# Altium PCB Pyro_Sensor.PcbDoc
Units mil, origin at the board's own origin, x right, y up, seen from the top; angles counter-clockwise.
Board outline 4000 x 4000 mil, 4 copper layers (Top Layer, Ground Plane, Power Plane, Bottom Layer), stack 23.756 mil thick; 57 components, 35 nets, 223 pads, 64 vias.
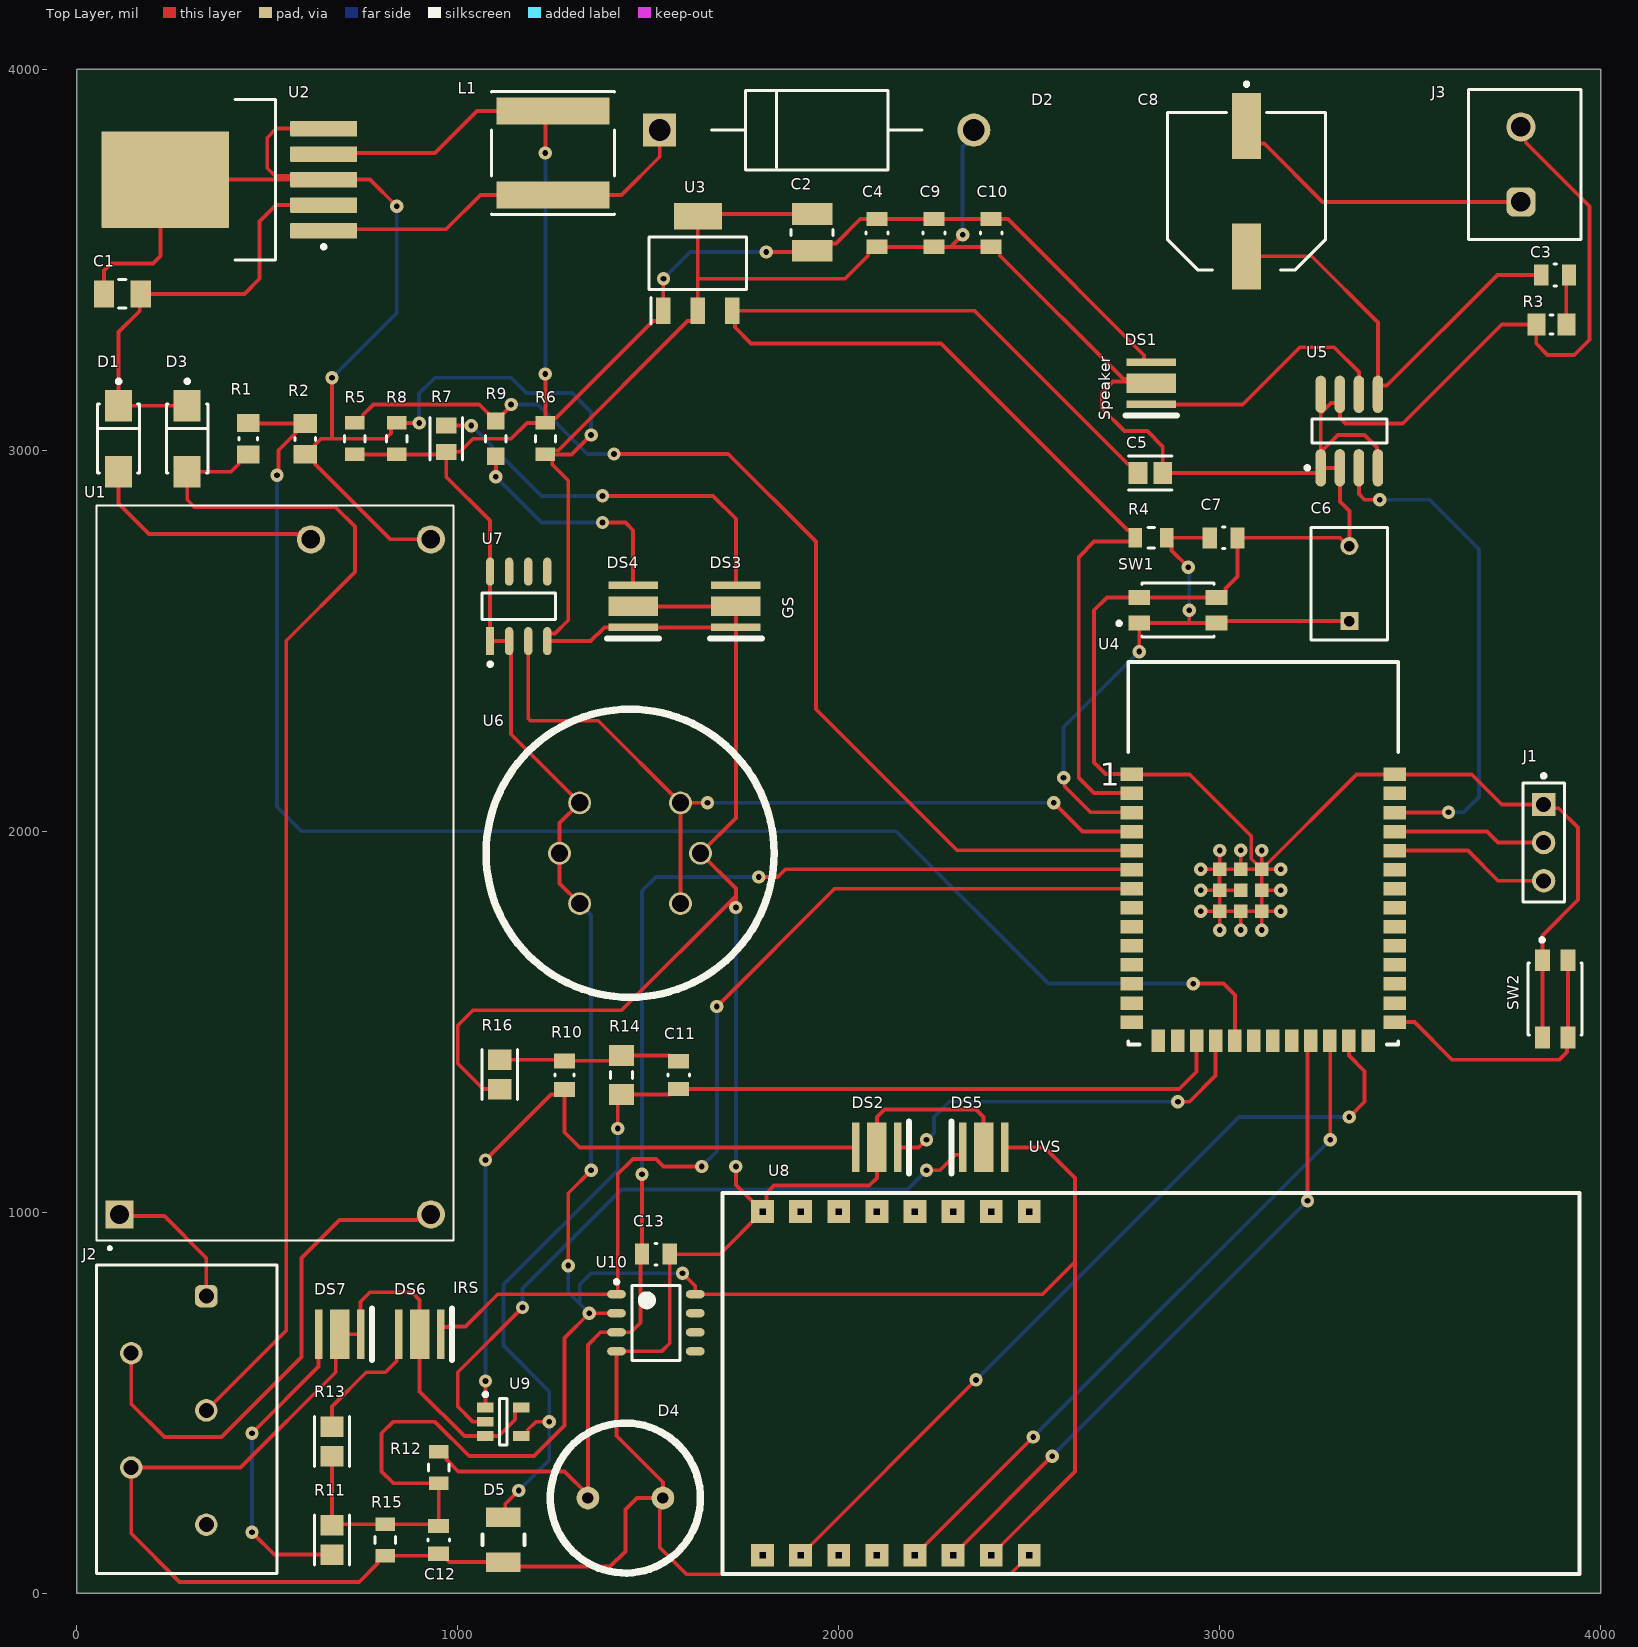
[diagram p0: Top Layer view]
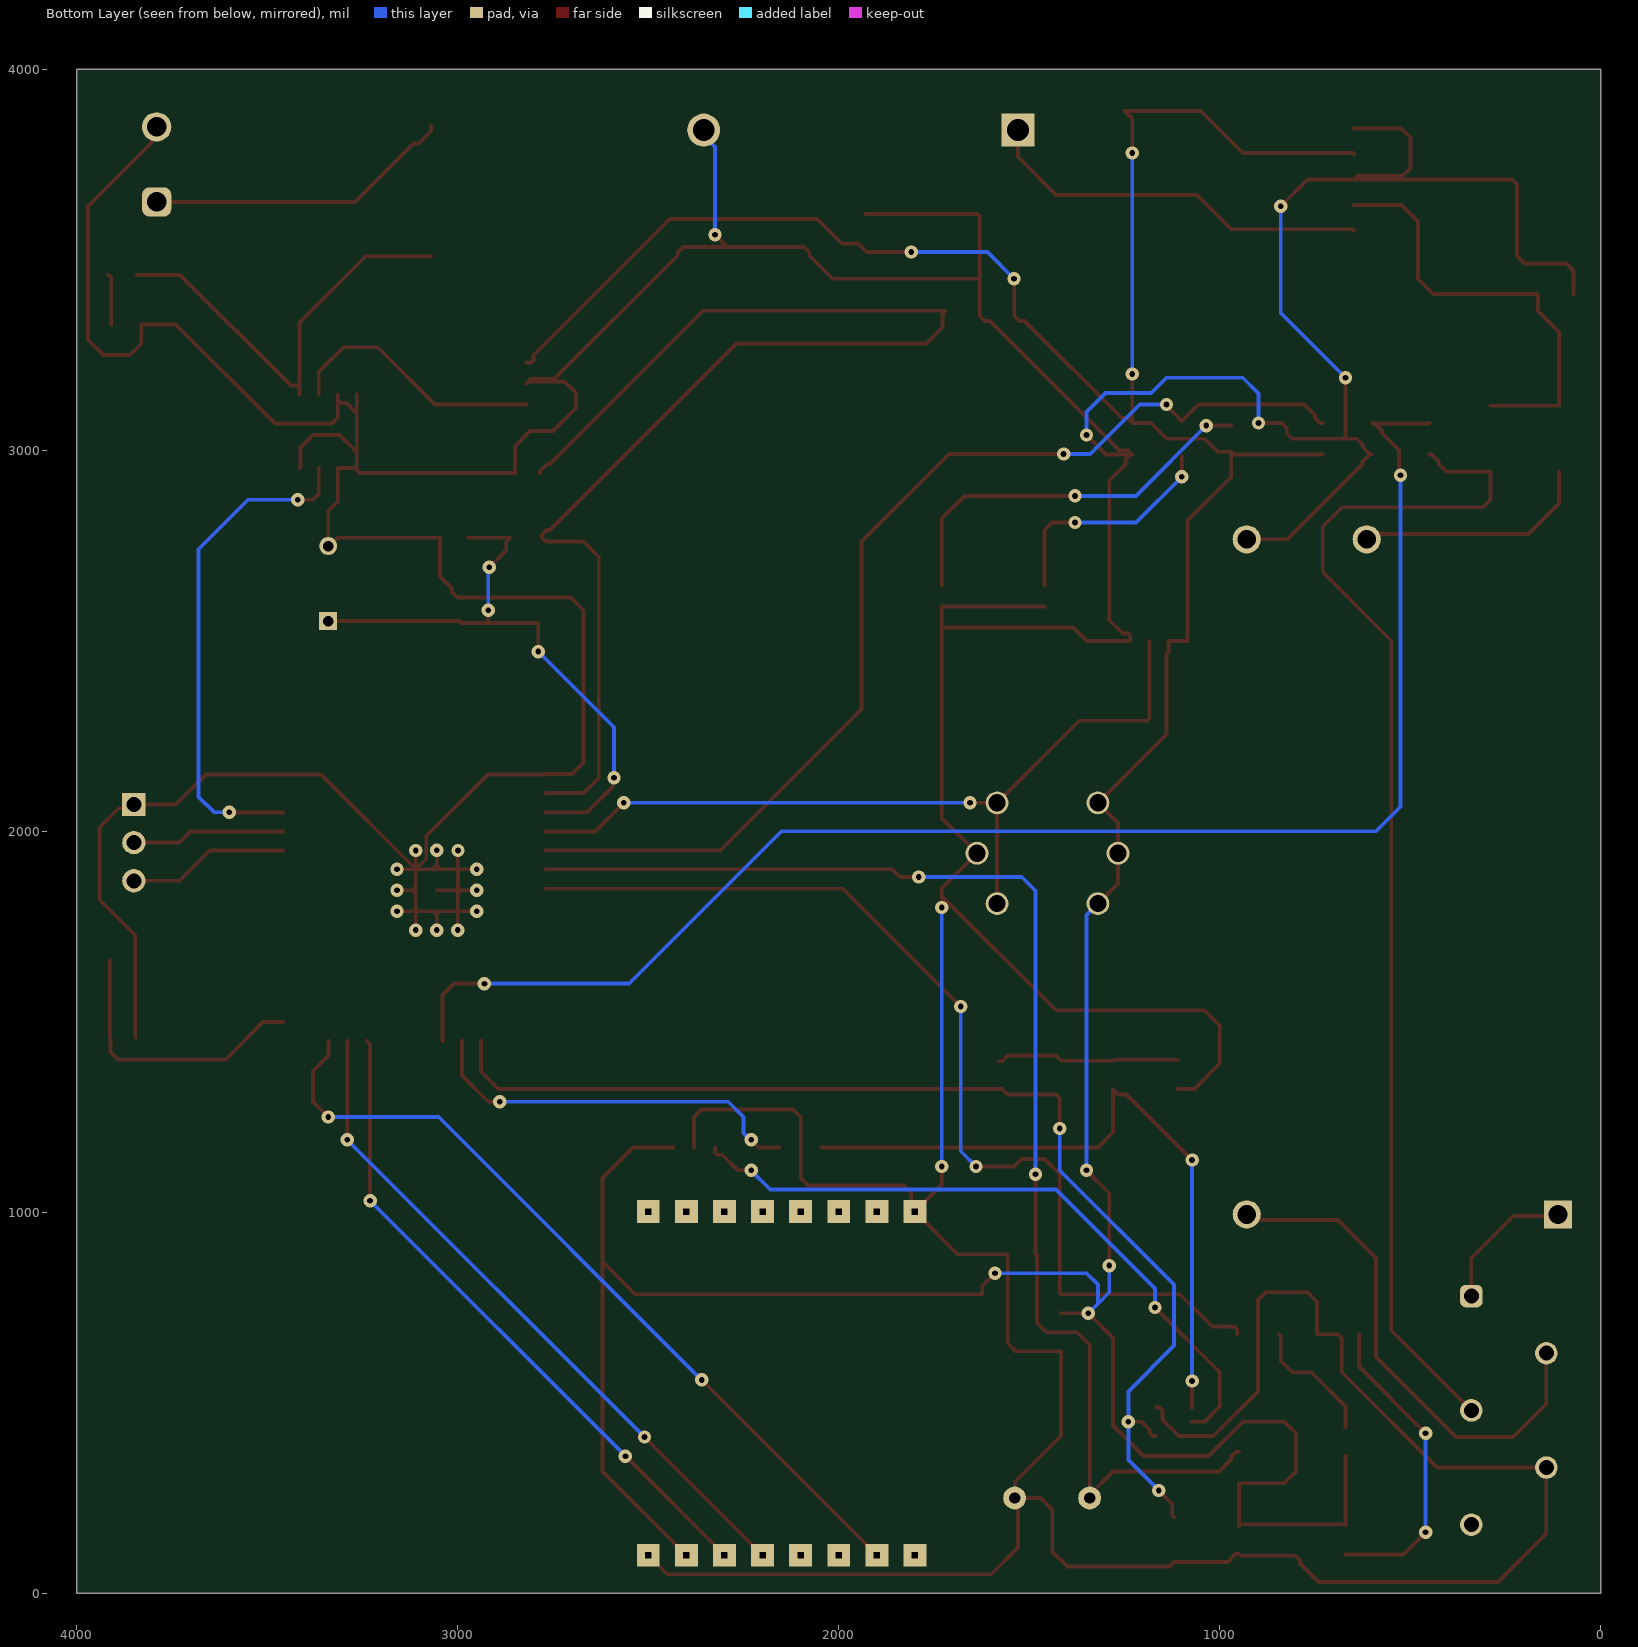
[diagram p1: Bottom Layer view, seen from below]
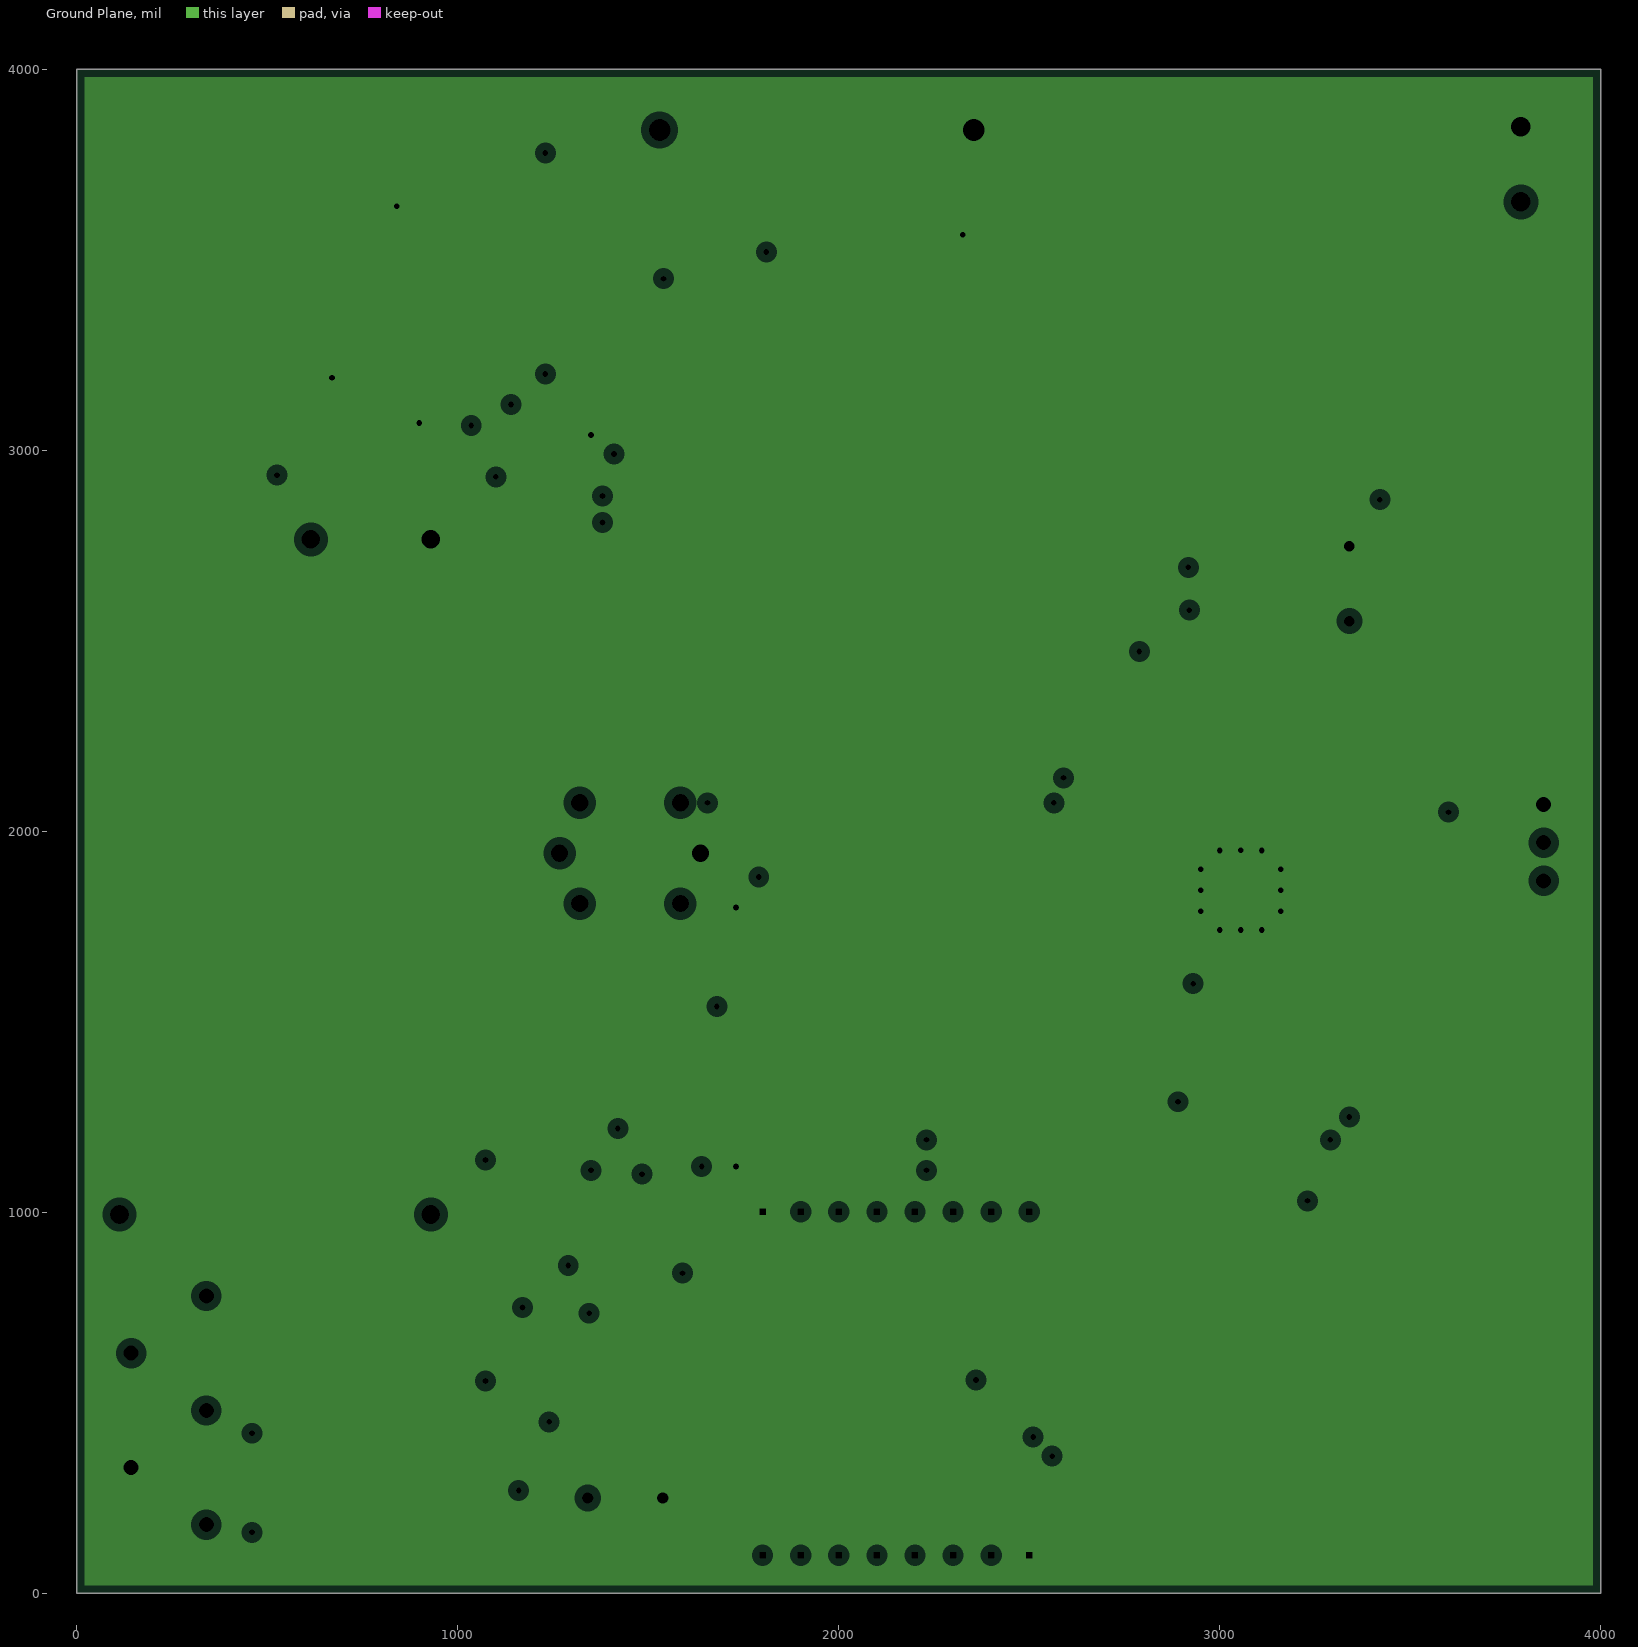
[diagram p2: Ground Plane, clearances drawn from the general rule]
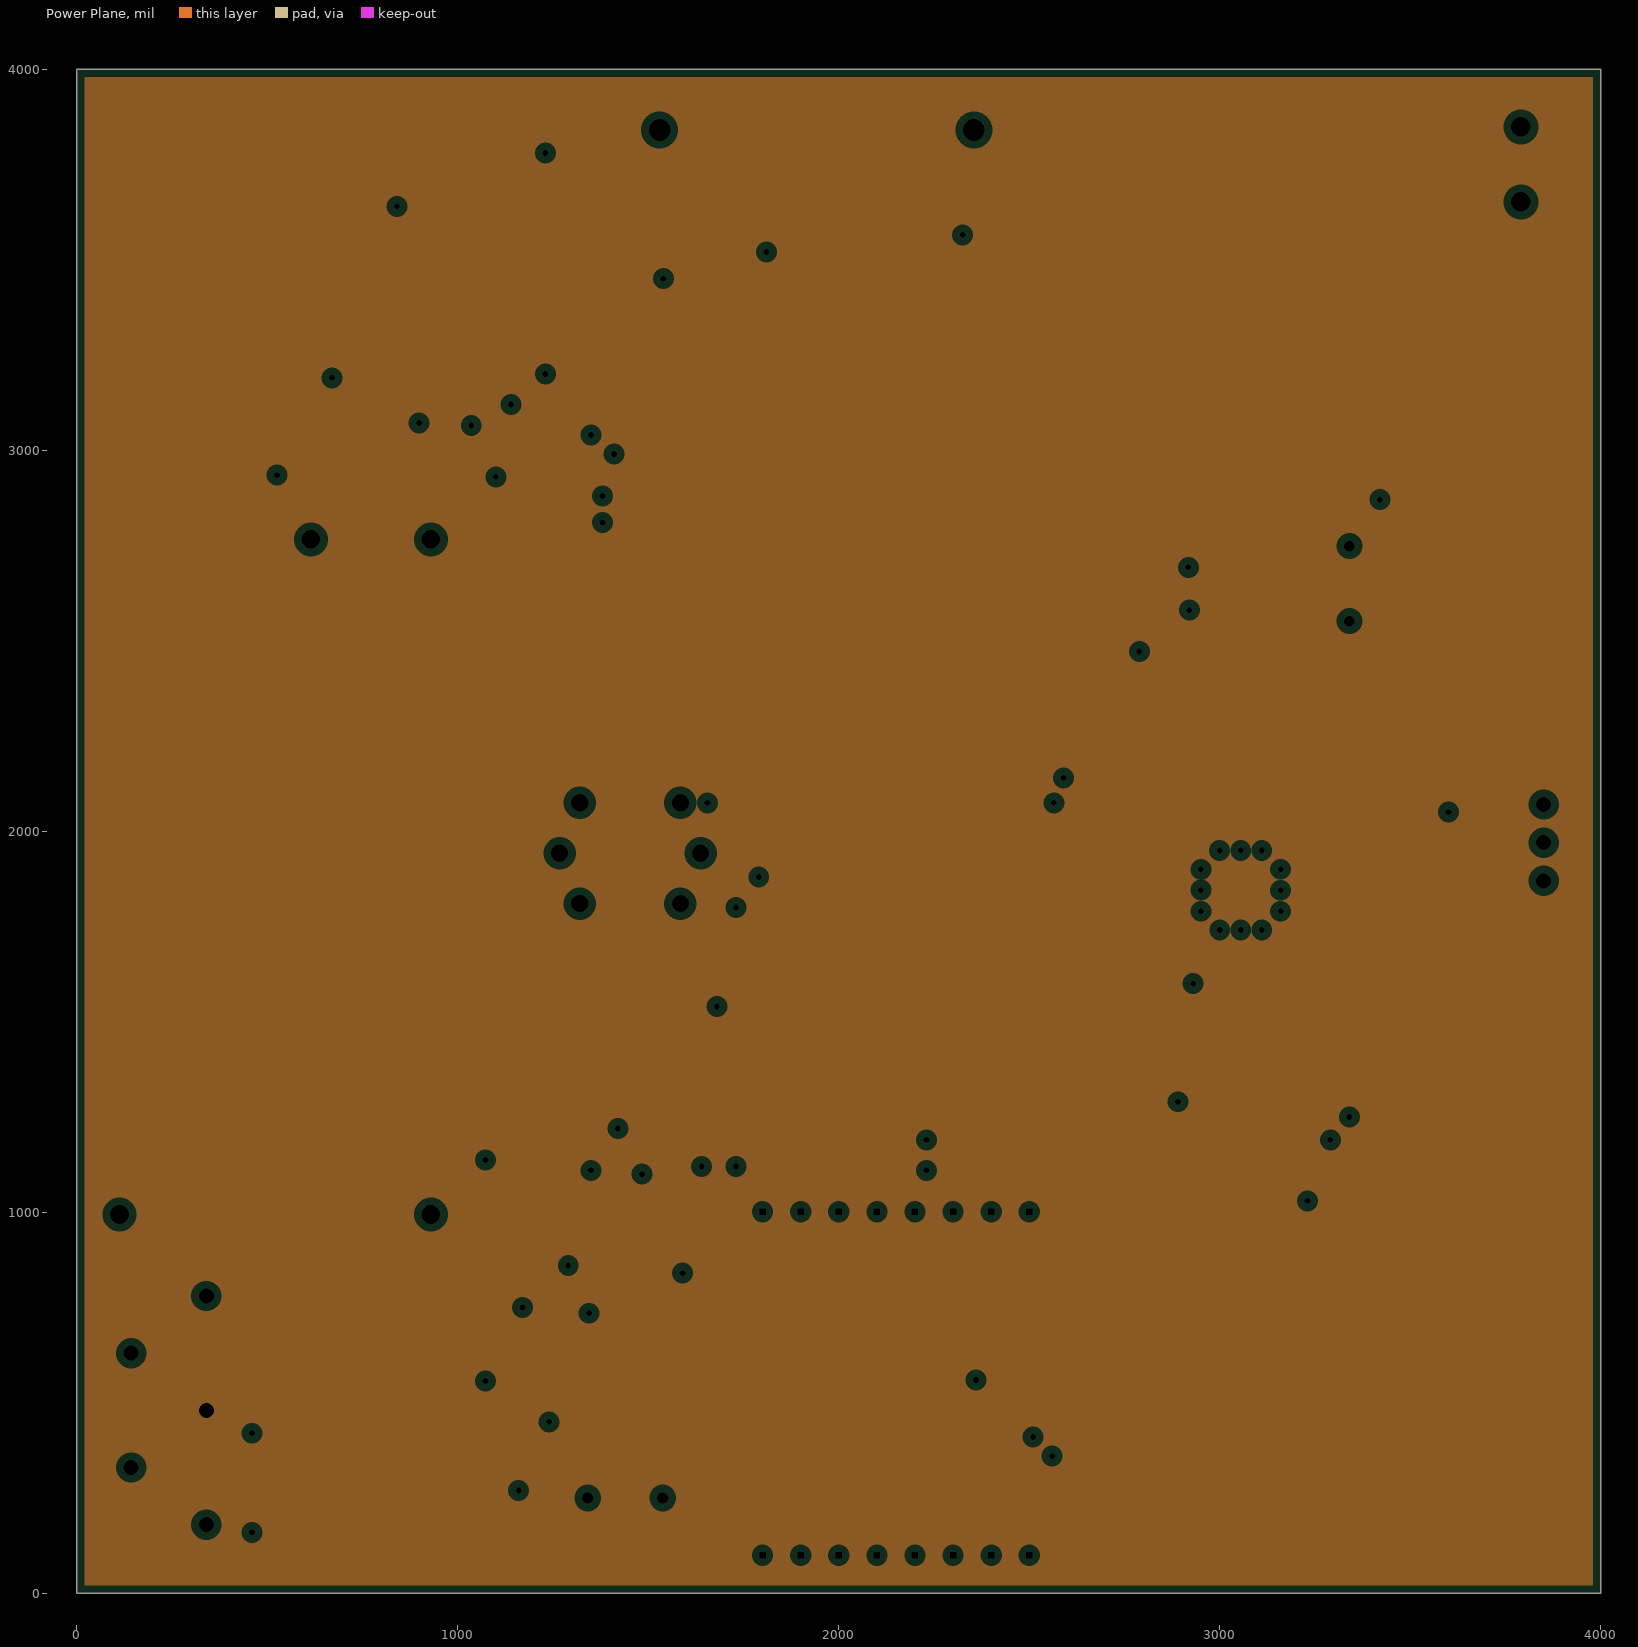
[diagram p3: Power Plane, clearances drawn from the general rule]

## Layer stack, top to bottom
Top Solder: solder mask 0.4, Solder Resist, Dk 3.5
Top Layer: signal copper 1.4
Dielectric 2: prepreg 2.8, PP-006, Dk 4.1
Ground Plane: plane copper 1.378, net GND
Dielectric 1: dielectric 12.6, FR-4, Dk 4.8
Power Plane: plane copper 1.378, net Battery
Dielectric 3: prepreg 2.8, PP-006, Dk 4.1
Bottom Layer: signal copper 1.4
Bottom Solder: solder mask 0.4, Solder Resist, Dk 3.5

## Board outline
0,0 0,4000 4000,4000 4000,0

## Design rules (kind name [scope] priority, off if disabled: settings)
Clearance [All] p1: gap=5 ignorepadtopadclearanceinfootprint=FALSE
ComponentClearance [All] p1 off: gap=10 collisioncheckmode=3 verticalgap=10 showdistances=FALSE
DiffPairsRouting [All] p1: maxlimit=13 minlimit=13 mostfreqgap=13 toplayer_minwidth=7.42 toplayer_maxwidth=13 toplayer_prefwidth=7.42 bottomlayer_minwidth=7.42 bottomlayer_maxwidth=13 bottomlayer_prefwidth=7.42 maxuncoupledlength=500
FabricationTestPointUsage TestPointUsage [All] p1: valid=0 allowmultiple=FALSE
FabricationTestpoint Testpoint [All] p1: side=3 testpointundercomponent=TRUE minsize=40 maxsize=100 preferedsize=60 minholesize=20 maxholesize=40 preferedholesize=32 testpointgrid=1 allowsidetop=TRUE allowsidebottom=TRUE usegrid=TRUE gridtolerance=0.01
Height [All] p1 off: minheight=0 maxheight=1000 prefheight=500
HoleSize [All] p1: absolutevalues=TRUE maxlimit=800 minlimit=10 maxpercent=80.000 minpercent=20.000
MatchedLengths MatchedLengths_I210Rx [InNetClass('I210Rx')] p1: tolerance=5 checknetsindiffpair=FALSE checkdiffpairvsdiffpair=TRUE checkxsignals=TRUE checkothers=TRUE
MatchedLengths MatchedLengths_I210Tx [InNetClass('I210Tx')] p2: tolerance=5 checknetsindiffpair=FALSE checkdiffpairvsdiffpair=TRUE checkxsignals=TRUE checkothers=TRUE
MatchedLengths MatchedLengths_mSATARx [InNetClass('mSATARx')] p3: tolerance=25 checknetsindiffpair=FALSE checkdiffpairvsdiffpair=TRUE checkxsignals=TRUE checkothers=TRUE
MatchedLengths MatchedLengths_mSATATx [InNetClass('mSATATx')] p4: tolerance=25 checknetsindiffpair=FALSE checkdiffpairvsdiffpair=TRUE checkxsignals=TRUE checkothers=TRUE
MatchedLengths MatchedLengths_PCIECLK [InNetClass('PCIECLK')] p5: tolerance=25 checknetsindiffpair=FALSE checkdiffpairvsdiffpair=TRUE checkxsignals=TRUE checkothers=TRUE
MatchedLengths MatchedLengths_PCIETx [InNetClass('PCIETx')] p6: tolerance=5 checknetsindiffpair=FALSE checkdiffpairvsdiffpair=TRUE checkxsignals=TRUE checkothers=TRUE
MatchedLengths MatchedLengths_PCIERx [InNetClass('PCIERx')] p7: tolerance=5 checknetsindiffpair=FALSE checkdiffpairvsdiffpair=TRUE checkxsignals=TRUE checkothers=TRUE
MinimumSolderMaskSliver [All] p1: minsoldermaskwidth=5
PlaneClearance [All] p1: clearance=20
PlaneConnect [All] p1: planeconnectstyle=Relief reliefexpansion=20 reliefentries=4 reliefconductorwidth=15 reliefairgap=10
PolygonConnect [All] p1: connectstyle=Direct reliefconductorwidth=20 reliefentries=4 polygonreliefangle="90 Angle" airgapwidth=30
RoutingVias [All] p1: holewidth=20 width=40 viastyle="Through Hole" minholewidth=15 minwidth=35 maxholewidth=28 maxwidth=50
SilkToSilkClearance [All] p1: silktosilkclearance=5
SilkToSolderMaskClearance SilkscreenOverComponentPads [IsPad] p1: minsilkscreentomaskgap=5 clearancetoexposedcopper=TRUE
SolderMaskExpansion [All] p1: expansion=4 istentingtop=FALSE
SupplyNets "Schematic Supply Nets" [InNet('GND')] p1: voltage=0.000
Width [All] p1: maxlimit=500 minlimit=5 preferedwidth=10
19 further rules are at their usual default settings.

## Components (designator, comment, footprint, x,y, rotation, side; value= is the part's Value field where it differs from the comment)
C1 "GRM31CC80E227ME11K" FP-GRM31C-0_3-e0_3_0_9-IPC_C 120,3410 r0 top
C2 "CL32A157MQVNNNE" FP-CL32-IPC_C 1930,3571.76 r90 top
C3 "CC0805KRX7R9BB104" FP-CC0805-0_85-MFG 3880,3460 r0 top value="100 nF"
C4 "CC0805KRX7R9BB104" FP-CC0805-0_85-MFG 2100,3570 r270 top value="100 nF"
C5 "CL21A106KOQNNNE" FP-CL21-IPC_B 2817.49,2940 r0 top
C6 "R82DC4100DQ60J" FP-R82DC4100DQ60J-MFG 3340,2650 r90 top
C7 "CC0805KRX7R9BB104" FP-CC0805-0_85-MFG 3010,2770 r0 top value="100 nF"
C8 "16SVT1000M" FP-OS-CON-SMT-F12-MFG 3070,3680 r270 top
C9 "CC0805KRX7R9BB104" FP-CC0805-0_85-MFG 2250,3570 r270 top value="100 nF"
C10 "CC0805KRX7R9BB104" FP-CC0805-0_85-MFG 2400,3570 r270 top value="100 nF"
C11 "CC0805KRX7R9BB104" FP-CC0805-0_85-MFG 1580,1360 r90 top value="100 nF"
C12 "CC0805KRX7R9BB104" FP-CC0805-0_85-MFG 950,140 r270 top value="100 nF"
C13 "CC0805KRX7R9BB104" FP-CC0805-0_85-MFG 1520,890 r0 top value="100 nF"
D1 "SMAJ24A" FP-SMAJ-MFG 110,3030 r270 top
D2 "1N5822" FP-DO-201AD-MFG 1942.2,3840 r0 top
D3 "SMAJ24A" FP-SMAJ-MFG 290,3030 r270 top
D4 "IRS" "IRS Thruhole" 1440,250 r180 top
D5 "UVS" "UVS SMD" 1120,81.89 r180 top
DS1 "XPEBRD-L1-0000-00801" CREE-XPEBRD-L1_V 2820,3175.12 r270 top
DS2 "XTEARY-00-0000-000000M09" CREE-XTE-2_V 2100,1170 r0 top
DS3 "XPEBRD-L1-0000-00801" CREE-XPEBRD-L1_V 1730,2590 r270 top
DS4 "XTEARY-00-0000-000000M09" CREE-XTE-2_V 1460,2590 r270 top
DS5 "XPEBRD-L1-0000-00801" CREE-XPEBRD-L1_V 2380,1170 r180 top
DS6 "XTEARY-00-0000-000000M09" CREE-XTE-2_V 900,680 r0 top
DS7 "XPEBRD-L1-0000-00801" CREE-XPEBRD-L1_V 690,680 r0 top
J1 "PREC003SAAN-RC" FP-PREC003SAAN-RC-MFG 3850,1970 r270 top
J2 "691412320005" 691412320005 288.82,456.57 r90 top
J3 "691137710002" 691137710002 3800,3750 r90 top
L1 "NR8040T680M" FP-NR8040-H_4_0-MFG 1250,3780 r90 top
R1 "CRCW08055K60FKEA" FP-CRCW0805-e3-IPC_A 450,3030 r270 top
R2 "RK73H2ATTD3301F" RESC2013X60X30ML20T20 600,3029.65 r90 top
R3 "RC0805FR-0710RL" RESC2013X60X35ML10T20 3870,3330 r0 top
R4 "RMCF0805FT10K0" FP-RMCF0805-MFG 2820,2770 r180 top
R5 "RMCF0805FT10K0" FP-RMCF0805-MFG 730,3030 r90 top
R6 "RMCF0805FT10K0" FP-RMCF0805-MFG 1230,3030 r90 top
R7 "CR0805-JW-331ELF" FP-CR0805-IPC_B 970,3030 r270 top
R8 "RMCF0805FT10K0" FP-RMCF0805-MFG 840,3030 r270 top
R9 "ERA6AEB203V" FP-ERA6A-MFG 1100,3030 r90 top
R10 "CRCW08053K83FKEA" FP-CRCW0805-e3-IPC_B 1280,1360 r90 top
R11 "RR1220P-102-D" FP-RR1220-IPC_A 670,140 r90 top
R12 "RMCF0805FT10K0" FP-RMCF0805-MFG 950,330 r270 top
R13 "RR1220P-102-D" FP-RR1220-IPC_A 670,398.41 r270 top
R14 "RG2012P-105-B-T5" FP-RG2012-MFG 1430,1360 r90 top
R15 "RMCF0805FT10K0" FP-RMCF0805-MFG 810,140 r90 top
R16 "RR1220P-102-D" FP-RR1220-IPC_A 1110,1361.59 r90 top
SW1 "EVQ-P2202W" FP-EVQ-P2202W-MFG 2890,2580 r90 top
SW2 "EVQ-P2202W" FP-EVQ-P2202W-MFG 3880,1560 r0 top
U1 "MFM-15-12_1" CONV_MFM-15-12 520,1890 r90 top
U2 "LM2595S-12/NOPB" KTT0005B_M 400,3710 r180 top
U3 "LM2937IMP-3.3" SOT230P700X180-4N 1630,3490 r90 top
U4 "ESP32-S3-WROOM-1" ESP32 2769.45,2149.06 r0 top
U5 "LM386M-1/NOPB" TI-D8_M 3340,3050 r90 top
U6 "MQ-2" "MQ-2 Thruhole" 1452.23,1942.23 r0 top
U7 "LM358DR2G" FP-751-07-IPC_C 1160,2590 r90 top
U8 "GS" "GS DIP Socket" 2500,1035.04 r270 top
U9 "MCP6001RT-E/OT" SOT-23-OT5_N 1120,450 r0 top
U10 "LM393DT" STM-SO-8_D_L 1520,710 r0 top

## Footprints (in the part's own frame and the unit in brackets; to place one, negate y for a bottom-side part, rotate by r counter-clockwise, add the part's x,y. Pads: shape width x height; smd on the part's side, far side on the other; paste and mask are expansions set on the pad)
691137710002 [mm] "Horizontal Cable Entry with Pressure Clamp, pitch 5mm, 02p"
  rrect50% 1.95x1.95 hole 1.3: 1(-2.5,0.25)
  round 1.95 hole 1.3: 2(2.5,0.25)
  silkscreen extent -5,-3.75 5,3.75, body extent -5,-3.75 5,3.75, height 11.6
691412320005 [mm] "3.81mm 45¡ã Cable Entry Screwless, 5p"
  rrect50% 1.5x1.5 hole 1: 1(8.215,-1.3)
  round 1.5 hole 1: 2(4.405,3.7) 3(0.595,-1.3) 4(-3.215,3.7) 5(-7.025,-1.3)
  silkscreen extent -10.28,-6 10.28,6, body extent -10.28,-6 10.28,6, height 13.28
CONV_MFM-15-12 [mm]
  rect 1.875x1.875 / inner round 1.875 / far side rect 1.875x1.875 hole 1.25: 1(-22.75,10.35)
  round 1.875 hole 1.25: 2(-22.75,-10.4) 3(22.25,-10.4) 4(22.25,-2.4)
  silkscreen extent -25.1,-11.9 24.5,11.9
CREE-XPEBRD-L1_V [mm] "SMD, 3-Leads, Body 3.45x3.45mm"
  rect 0.5x3.3 smd: 1(-1.4,0) 2(1.4,0)
  rect 1.3x3.3 smd paste-1: 3(0,0)
  silkscreen extent 2.15,-1.73 2.15,1.73, body extent -1.72,-1.73 1.73,1.73, height 2.39
CREE-XTE-2_V [mm] "SMD, 3-Leads, Body 3.45x3.45mm"
  rect 0.5x3.3 smd: 1(-1.4,0) 3(1.4,0)
  rect 1.3x3.3 smd: 2(0,0)
  silkscreen extent 2.15,-1.73 2.15,1.73, body extent -1.73,-1.73 1.73,1.73, height 2.36
ESP32 [mm]
  rect 1.5x0.9 smd: 1(0,0) 2(0,-1.27) 3(0,-2.54) 4(0,-3.81) 5(0,-5.08) 6(0,-6.35) 7(0,-7.62) 8(0,-8.89) 9(0,-10.16) 10(0,-11.43) 11(0,-12.7) 12(0,-13.97) 13(0,-15.24) 14(0,-16.51) 27(17.5,-16.51) 28(17.5,-15.24) 29(17.5,-13.97) 30(17.5,-12.7) 31(17.5,-11.43) 32(17.5,-10.16) 33(17.5,-8.89) 34(17.5,-7.62) 35(17.5,-6.35) 36(17.5,-5.08) 37(17.5,-3.81) 38(17.5,-2.54) 39(17.5,-1.27) 40(17.5,0)
  rect 0.9x1.5 smd: 15(1.765,-17.76) 16(3.035,-17.76) 17(4.305,-17.76) 18(5.575,-17.76) 19(6.845,-17.76) 20(8.115,-17.76) 21(9.385,-17.76) 22(10.655,-17.76) 23(11.925,-17.76) 24(13.195,-17.76) 25(14.465,-17.76) 26(15.735,-17.76)
  rect 0.9x0.9 smd: 41(5.85,-9.12) 41(5.85,-7.72) 41(5.85,-6.32) 41(7.25,-9.12) 41(7.25,-7.72) 41(7.25,-6.32) 41(8.65,-9.12) 41(8.65,-7.72) 41(8.65,-6.32)
  silkscreen extent -0.25,-18.01 17.75,7.49
FP-751-07-IPC_C [mil]
  rect 73.78x21.39 smd paste+0 mask+0: 1(-91.18,75)
  rrect100% 73.78x21.39 smd paste+0 mask+0: 2(-91.18,25) 3(-91.18,-25) 4(-91.18,-75) 5(91.18,-75) 6(91.18,-25) 7(91.18,25) 8(91.18,75)
  silkscreen extent -157,-96 35,96, body extent -132,-100 132,100, height 10
FP-CC0805-0_85-MFG [mm]
  rect 0.95x1.4 smd paste+0 mask+0: 1(-0.925,0) 2(0.925,0)
  silkscreen extent -0.08,-0.72 0.08,0.72, body extent -1.6,-1.05 1.6,1.05, height 0.25
FP-CL21-IPC_B [mil]
  rect 49.4x57.33 smd paste+0 mask+0: 1(-32.51,0) 2(32.51,0)
  silkscreen extent -57,-44 57,44, body extent -67,-39 67,39, height 10
FP-CL32-IPC_C [mil]
  rect 57.19x106.46 smd paste+0 mask+0: 1(-48.24,0) 2(48.24,0)
  silkscreen extent -8,-55 8,55, body extent -81,-59 81,59, height 10
FP-CR0805-IPC_B [mil]
  rect 41.66x53.63 smd paste+0 mask+0: 1(-34.53,0) 2(34.53,0)
  silkscreen extent -55,-43 55,43, body extent -65,-37 65,37, height 10
FP-CRCW0805-e3-IPC_A [mil]
  rect 47.5x59.38 smd paste+0 mask+0: 1(-41.37,0) 2(41.37,0)
  silkscreen extent -3,-25 3,25, body extent -85,-49 85,49, height 10
FP-CRCW0805-e3-IPC_B [mil]
  rect 39.63x55.44 smd paste+0 mask+0: 1(-37.44,0) 2(37.44,0)
  silkscreen extent -3,-25 3,25, body extent -67,-38 67,38, height 10
FP-DO-201AD-MFG [mm]
  rect 2.2x2.2 hole 1.45 paste-2539.97 mask+0: 1(-10.47,0)
  round 2.2 hole 1.45 paste-2539.97 mask+0: 2(10.47,0)
  silkscreen extent -7,-2.65 7,2.65, body extent -11.67,-2.75 11.67,2.75, height 0.25
FP-ERA6A-MFG [mm]
  rect 1.15x1.15 smd paste+0 mask+0: 1(-1.175,0) 2(1.175,0)
  silkscreen extent -0.23,-0.67 0.23,0.67, body extent -1.85,-0.77 1.85,0.77, height 0.25
FP-EVQ-P2202W-MFG [mm]
  rect 1x1.45 smd paste+0 mask+0: 1(-0.85,2.575) 2(0.85,2.575) 3(-0.85,-2.575) 4(0.85,-2.575)
  silkscreen extent -1.8,-2.4 1.8,4.05, body extent -1.9,-3.4 1.9,3.4, height 0.25
FP-GRM31C-0_3-e0_3_0_9-IPC_C [mil]
  rect 53.28x71.03 smd paste+0 mask+0: 1(-48.25,0) 2(48.25,0)
  silkscreen extent -10,-37 10,37, body extent -79,-41 79,41, height 10
FP-NR8040-H_4_0-MFG [mm]
  rect 1.8x7.5 smd paste+0 mask+0: 1(-2.8,0) 2(2.8,0)
  silkscreen extent -4.1,-4.1 4.1,4.1, body extent -4.2,-4.2 4.2,4.2, height 0.25
FP-OS-CON-SMT-F12-MFG [mm]
  rect 4.4x1.9 smd paste+0 mask+0: 1(-4.35,0) 2(4.35,0)
  silkscreen extent -7.25,-5.25 5.25,5.25, body extent -6.8,-5.5 6.8,5.5, height 0.25
FP-PREC003SAAN-RC-MFG [mm]
  rect 1.55x1.55 hole 1 paste-2539.97 mask+0: 1(-2.54,0)
  round 1.55 hole 1 paste-2539.97 mask+0: 2(0,0) 3(2.54,0)
  silkscreen extent -4.57,-1.37 3.96,1.37, body extent -4.06,-1.47 4.06,1.47, height 0.25
FP-R82DC4100DQ60J-MFG [mm]
  rect 1.2x1.2 hole 0.7 paste-2539.97 mask+0: 1(-2.5,0)
  round 1.2 hole 0.7 paste-2539.97 mask+0: 2(2.5,0)
  silkscreen extent -3.75,-2.55 3.75,2.55, body extent -3.85,-2.65 3.85,2.65, height 0.25
FP-RG2012-MFG [mm]
  rect 1.4x1.65 smd paste+0 mask+0: 1(-1.3,0) 2(1.3,0)
  silkscreen extent -0.22,-0.72 0.22,0.72, body extent -2.1,-0.92 2.1,0.92, height 0.25
FP-RMCF0805-MFG [mm]
  rect 0.9x1.3 smd paste+0 mask+0: 1(-1.05,0) 2(1.05,0)
  silkscreen extent -0.23,-0.67 0.23,0.67, body extent -1.6,-0.77 1.6,0.77, height 0.25
FP-RR1220-IPC_A [mil]
  rect 53.34x61.27 smd paste+0 mask+0: 1(-38.41,0) 2(38.41,0)
  silkscreen extent -65,-46 65,46, body extent -85,-50 85,50, height 10
FP-SMAJ-MFG [mm]
  rect 2.1x1.8 smd paste+0 mask+0: 1(-2.2,0) 2(2.2,0)
  silkscreen extent -3.95,-1.4 2.3,1.4, body extent -3.35,-1.5 3.35,1.5, height 0.25
"GS DIP Socket" [mil]
  rect 60x60 hole 15.75 square: 1(33.46,0) 2(33.46,-100) 3(33.46,-200) 4(33.46,-300) 5(33.46,-400) 6(33.46,-500) 7(33.46,-600) 8(33.46,-700) 9(935.04,-700) 10(935.04,-600) 11(935.04,-500) 12(935.04,-400) 13(935.04,-300) 14(935.04,-200) 15(935.04,-100) 16(935.04,0)
  silkscreen extent -16,-805 984,1444
"IRS Thruhole" [mil]
  round 60 hole 29.92: 1(-98.43,0) 2(98.43,0)
  silkscreen extent -197,-197 197,197
KTT0005B_M [mm] "DPAK, 5-Leads, Body 10.65x9.65mm, Pitch 1.7mm, IPC Low Density"
  rrect10% 4.45x1.05 smd: 1(-6.3,3.4) 2(-6.3,1.7) 3(-6.3,0) 4(-6.3,-1.7) 5(-6.3,-3.4)
  rrect2% 8.5x6.45 smd: 6(4.25,0)
  silkscreen extent -6.43,-5.35 -0.4,5.35, body extent -3.1,-5.32 6.55,5.33, height 4.83
"MQ-2 Thruhole" [mil]
  round 60 hole 45.28: 1(-132.23,132.23) 2(-185,0) 3(-132.23,-132.23) 4(132.23,132.23) 5(185,0) 6(132.23,-132.23)
  silkscreen extent -378,-378 378,378
RESC2013X60X30ML20T20 [mm] "Chip Resistor, 2-Leads, Body 2.00x1.25mm, IPC Low Density"
  rect 1.25x1.55 smd: 1(-1.025,0) 2(1.025,0)
  silkscreen extent -0.1,-0.67 0.1,0.67, body extent -1.1,-0.72 1.1,0.72, height 0.6
RESC2013X60X35ML10T20 [mm] "Chip Resistor, 2-Leads, Body 2.1x1.35mm, IPC Low Density"
  rect 1.2x1.45 smd: 1(-1,0) 2(1,0)
  silkscreen extent -0.1,-0.63 0.1,0.63, body extent -1.05,-0.68 1.05,0.67, height 0.6
SOT230P700X180-4N [mm]
  rect 1.75x0.95 smd: 1(-3.15,2.3) 2(-3.15,0) 3(-3.15,-2.3)
  rect 1.75x3.2 smd: 4(3.15,0)
  silkscreen extent -4.03,-3.25 1.75,3.25, body extent -3.5,-3.25 3.5,3.25, height 1.68
SOT-23-OT5_N [mm] "SOT23, 5-Leads, Body 2.9x1.7mm, Pitch 0.95mm, Lead Span 2.8mm, IPC Medium Density"
  rect 1.1x0.65 smd: 1(-1.2,0.95) 2(-1.2,0) 3(-1.2,-0.95) 4(1.2,-0.95) 5(1.2,0.95)
  silkscreen extent -1.32,-1.55 0.25,1.95, body extent -0.9,-1.55 0.9,1.55, height 1.45
STM-SO-8_D_L [mm] "SOIC, 8-Leads, Body 5x4mm, Pitch 1.27mm, IPC High Density"
  oval 1.25x0.55 smd: 1(-2.625,1.905) 2(-2.625,0.635) 3(-2.625,-0.635) 4(-2.625,-1.905) 5(2.625,-1.905) 6(2.625,-0.635) 7(2.625,0.635) 8(2.625,1.905)
  silkscreen extent -2.75,-2.5 1.6,2.85, body extent -3,-2.5 3,2.5, height 1.75
TI-D8_M [mm] "SOIC, 8-Leads, Body 5x4mm, Pitch 1.27mm, IPC Low Density"
  oval 2.5x0.7 smd: 1(-2.45,1.905) 2(-2.45,0.635) 3(-2.45,-0.635) 4(-2.45,-1.905) 5(2.45,-1.905) 6(2.45,-0.635) 7(2.45,0.635) 8(2.45,1.905)
  silkscreen extent -2.57,-2.5 0.8,2.93, body extent -2,-2.5 2,2.5, height 1.75
"UVS SMD" [mm]
  rect 2.3x1.3 smd: 1(0,0) 2(0,-3)
  silkscreen extent -1.4,-1.86 1.4,-1.14

## Part data
C1: library part CMP-06035-009531-1, "Chip Multilayer Ceramic Capacitors for General Purpose, 1206, 220uF, X6S, 22%, 20%, 2.5V", Capacitance=220uF, Dielectric=X6S, Tolerance=20%, Voltage Rating (DC)=2.5V, Length=3.2mm, Thickness=1.6mm, Width=1.6mm
C2: library part CMP-2000-06109-2, "Cap Ceramic 150uF 6.3V X5R ±20% SMD 1210 +85°C Embossed T/R", Capacitance=150uF, Case Code (Imperial)=1210, Case Code (Metric)=3225, Max Operating Temperature=85°C, Min Operating Temperature=-55°C, Package Quantity=1, Tolerance=20%, Voltage Rating=6.3V, Case/Package=1210, Lead Free="Lead Free", Length=0.126inch, Mount="Surface Mount", Packaging="Tape and Reel", Thickness=0.11inch, Voltage Rating (DC)=6.3V, Width=0.098inch
C3 C4 C7 C9 C10 C11 C12 C13: library part CMP-2100-03606-3, "CAP CER 0.1UF 50V X7R 0805", Capacitance="100 nF", Manufacturer=Yageo, Package=CC0805-0.85, Temperature="-30°C to +85°C", Temperature Characteristic=X7R, Temperature Range High=+85°C, Temperature Range Low=-30°C, Tolerance=0.1, Voltage Rating="50 V", Automotive=No, Category=Cap, ComponentLink2Description=Datasheet, ComponentLink2URL=http://www.yageo.com/documents/recent/UPY-GPHC_Y5V_6.3V-to-50V_8.pdf, Device Class L1="Passive Components", Device Class L2=Capacitors, Device Class L3="Ceramic Capacitors", Digikey Description="CAP CER 0.1UF 50V X7R 0805", Footprint Url=http://www.yageo.com/exep/pages/download/literatures/UPY-C_GEN_24.pdf, Height=0.95mm, Ipc Land Pattern Name=CAPC200125X85, Lead Free=Yes, Manufacturer Part Number=CC0805KRX7R9BB104, Material=Ceramic, Mouser Description="Multilayer Ceramic Capacitors MLCC - SMD/SMT 100nF 50V X7R 10%", Octopart=https://octopart.com/cc0805krx7r9bb104-yageo-192993, RoHS=TRUE
C5: library part CMP-2000-06102-2, "CL21 Series 0805 10uF 16V ±10% Tolerance X5R Multilayer Ceramic Chip Capacitor", Capacitance=10uF, Case Code (Imperial)=0805, Case Code (Metric)=2012, Dielectric=X7R, Max Operating Temperature=85°C, Min Operating Temperature=-55°C, Package Quantity=1, Tolerance=10%, Voltage=16V, Case/Package=0805, Depth=1.25mm, Height=1.25mm, Lead Free="Lead Free", Length=2mm, Mount="Surface Mount", Packaging="Tape and Reel", Radiation Hardening=No, Thickness=0.055inch, Voltage Rating=16V, Voltage Rating (DC)=16V, Width=0.049inch
C6: library part CMP-03022-000017-1, "CAP FILM 1UF 5% 63VDC RADIAL", Capacitance=1uF, Case/Package=Radial, Dielectric=PET, Insulation Resistance=30R, Max Operating Temperature=105°C, Min Operating Temperature=-55°C, Package Quantity=1700, Tolerance=5%, Voltage=63V, Voltage Rating (AC)=40V, Construction=RADIAL, Contact Plating=Tin, Depth=5mm, Dielectric Material=PET, Dissipation Factor=80%, Height - Seated (Max)=0.398inch, Lead Diameter=0.5mm, Lead Pitch=5mm, Length=7.2mm, Life (Hours)=2000Hour, Mount="Through Hole", Packaging="Tape and Reel", Radiation Hardening=No, REACH SVHC="No SVHC", RoHS Compliant=Yes, Series=R82, Termination=Radial, Type="General Purpose", Voltage Rating=63V, Voltage Rating (DC)=63V, Width=5mm
C8: library part CMP-05428-000645-1, "Conductive Polymer Aluminum Solid Capacitors (OS-CON) 1000uF ±20% 16V RADIAL SMT 10x12.6mm", RoHS Compliant=Yes
D1 D3: library part CMP-08607-000085-1, "TVS DIODE 24V 38.9V DO214AC", Breakdown Voltage=26.7V, Clamping Voltage=38.9V, Manufacturer="Littelfuse Inc", Max Junction Temp=+150°C, Package=SMAJ, Peak Pulse Current=10.3A, Peak Pulse Power=400W, Reverse Standoff Voltage=24V, Temperature="-65°C to +150°C", Temperature Range Low=-65°C, Automotive=No, Category=Diode, ComponentLink2Description=Datasheet, ComponentLink2URL=https://www.littelfuse.com/~/media/electronics/datasheets/tvs_diodes/littelfuse_tvs_diode_smaj_datasheet.pdf.pdf, Device Class L1="Circuit Protection", Device Class L2="TVS Diodes", Device Class L3=unset, Digikey Description="TVS DIODE 24V 38.9V DO214AC", Direction=Unidirectional, Height=2.29mm, Lead Free=Yes, Manufacturer Part Number=SMAJ24A, Mouser Description="In a Pack of 25, Littelfuse SMAJ24A, Uni-Directional TVS Diode, 400W, 2-Pin DO-214AC", Number Of Channels=1, Octopart=https://octopart.com/smaj24a-littelfuse-350003, RoHS=TRUE, Temperature Range High=+150°C
D2: library part CMP-12187-000025-1, "DIODE SCHOTTKY 40V 3A DO201AD", Forward Current=3A, Manufacturer=STMicroelectronics, Max Junction Temp=+150°C, Max Repetitive Reverse Voltage=40V, Max Surge Forward Current=80A, Package=DO-201AD, Peak Reverse Current=2mA, Temperature="to +150°C", Automotive=No, Category=Diode, ComponentLink2Description=Datasheet, ComponentLink2URL=https://www.st.com/resource/en/datasheet/1n5822.pdf, Device Class L1="Discrete Semiconductors", Device Class L2=Diodes, Device Class L3="Schottky Diodes", Digikey Description="DIODE SCHOTTKY 40V 3A DO201AD", Height=5.3mm, Lead Free=Yes, Manufacturer Part Number=1N5822, Mouser Description="Schottky Diodes & Rectifiers Vr/40V Io/3A BULK", Octopart=https://octopart.com/1n5822-stmicroelectronics-323225, RoHS=TRUE, Temperature Range High=+150°C
D4: library part "IR Photodiode"
D5: library part GUVA-S12SD
DS1 DS3 DS5 DS7: library part CMP-2000-07424-1, "Cree(R) XLamp(R) XP-E2 LED, Red, Dominant Wavelength 620 to 630 nm, Minimum Luminous Flux 73.9 lm, 2-Pin SMD, RoHS, Tape and Reel", Forward Current=350mA, Forward Voltage=2.2V, Illumination Color=Red, Lens Color/Style=Clear, Manufacturer=Cree,Inc., Maximum Operating Temperature=+150C, Package Description="3-Pin Surface Mount Device, Body 3.45 x 3.45 mm", Package Reference=XPEBRD-L1, Power Rating=3W, Brand=Cree,Inc., Datasheet URL=http://www.cree.com/sitecore-modules/web/~/media/Files/Cree/LED-Components-and-Modules/XLamp/Data-and-Binning/XLampXPE2.pdf, Datasheet Version="Rev. 8I, 05/2016", Factory Pack Quantity=1000, Luminous Flux/Radiant Flux=73.9lm, Manufacturer URL=http://www.cree.com/, Mounting Style=SMD/SMT, Mounting Technology=SurfaceMount, Packaging=Reel, Product Category=HighPowerLEDs-SingleColor, RoHS=Details, Series=XlampXP-E2Color, Viewing Angle=130deg, Wavelength=630nm
DS2 DS4 DS6: library part CMP-2100-02557-1, "LED, Blue, 2.85 V, 2-Pin SMD, RoHS, Tape and Reel"
J1: library part CMP-00595-22265080-1, "PREC003SAAN-RC Conn Header Vert 3POS 2.54MM", Color=Black, Current Rating=3A, Max Operating Temperature=105°C, Min Operating Temperature=-40°C, Connector Type="Male Pin", Contact Material="Nickel, Tin", Contact Mating Length=5.842mm, Contact Plating=Tin, Height=8.74mm, Mount="Through Hole", NexarPartId=22265080, Number of Contacts=3, Number of Positions=3, Number of Rows=1, Packaging=Bulk, Pitch=2.54mm, RoHS=Compliant, Termination=Solder
J2: library part CMP-1502-02954-2, Lead Pitch=3.81mm, NexarPartId=78871498, Number of Pins=5, Packaging=Box, RoHS=Non-Compliant
J3: library part CMP-1502-03324-2, Current Rating=16A, Max Operating Temperature=120°C, Min Operating Temperature=-30°C, Voltage Rating=300V, Contact Material="Nickel, Tin", Height=11.6mm, Lead Pitch=5mm, NexarPartId=78871135, Number of Contacts=2, Number of Pins=2, Number of Rows=1, Packaging=Box, RoHS=Non-Compliant
L1: library part CMP-14484-001165-1, "Shielded Wirewound Inductor 68uH 20% 1.1A 0.299Ω SMD", Case/Package=Nonstandard, Current Rating=1.1A, DC Resistance (DCR)=299mR, Inductance=68uH, Max DC Current=1.2A, Max Operating Temperature=120°C, Min Operating Temperature=-25°C, Package Quantity=1, Resistor Type=Wirewound, Self Resonant Frequency=7MHz, Test Frequency=100kHz, Tolerance=20%, Core Material=Ferrite, Depth=8.2mm, Halogen Free="Halogen Free", Height=4mm, Height - Seated (Max)=0.157inch, Length=0.315inch, Mount="Surface Mount", Number of Pins=2, Packaging="Tape and Reel", Radiation Hardening=No, RoHS Compliant=Yes, Saturation Current=1.2A, Series=NR, Shielding=Shielded, Termination=SMD/SMT, Width=8mm
R1: library part CMP-2001-04030-2, "RES Thick Film, 5.6kΩ, 1%, 0.125W, 100ppm/°C, 0805", Case Code (Imperial)=0805, Case Code (Metric)=2012, Max Operating Temperature=155°C, Max Power Dissipation=125mW, Min Operating Temperature=-55°C, Package Quantity=1, Resistance=5.6K, Temperature Coefficient=100ppm/°C, Tolerance=1%, Voltage Rating=150V, Case/Package=0805, Composition="Thick Film", Contact Plating=Tin, Depth=1.25mm, Features="Automotive AEC-Q200", Height=0.45mm, Lead Free="Lead Free", Length=2mm, Military Standard=Not, Mount="Surface Mount", Number of Pins=2, Number of Terminations=2, Packaging="Tape and Reel", Power Rating=125mW, Radiation Hardening=No, Termination=SMD/SMT, Voltage Rating (DC)=150V, Weight=0.000194oz, Width=1.25mm
R2: library part CMP-2001-02326-1, Manufacturer="KOA Speer", Resistance=3.3K, Part Number=RK73H2ATTD3301F
R3: library part CMP-2100-03670-1, "Chip Resistor, 10 Ohm, +/- 1%, 0.125 W, -55 to 155 degC, 0805 (2012 Metric), RoHS, Tape and Reel", Case Code (Imperial)=0805, Case Code (Metric)=2012, Manufacturer=Yageo, Max Operating Temperature=155degC, Max Power Dissipation=125mW, Min Operating Temperature=-55degC, Package Description="2-Pin Surface Mounted Device, Body 2 x 1.25 mm", Package Quantity=1, Resistance=10, Temperature Coefficient=200ppm/degreesC, Tolerance=1%, Voltage Rating=150V, Case/Package=0805, Composition=ThickFilm, Datasheet URL=http://www.yageo.com/NewPortal/yageodocoutput?fileName=/pdf/R-Chip/PYu-RC_Group_51_RoHS_L_5.pdf, Datasheet Version="Rev. 5, 10/2016", Depth=1.25mm, Height=0.5mm, Lead Free=LeadFree, Length=2mm, Manufacturer URL=http://www.yageo.com/, Number of Pins=2, Number of Terminations=2, Package Reference=0805, Packaging=TapeandReel, Power Rating=125mW, REACH SVHC=NoSVHC, RoHSCompliant=true, Termination=SMD/SMT, Voltage Rating (DC)=150V, Width=1.25mm
R4 R5 R6 R8 R12 R15: library part CMP-26527-000121-1, "RES 10K OHM 1% 1/8W 0805", Case Code (Imperial)=0805, Case Code (Metric)=2012, Max Operating Temperature=155°C, Max Power Dissipation=125mW, Min Operating Temperature=-55°C, Resistance=10K, Resistor Type="Thick Film", Temperature Coefficient=100ppm/°C, Tolerance=1%, Case/Package=0805, Construction=Rectangular, Contact Plating=Tin, Depth=1.25mm, Features="Automotive AEC-Q200", Height=0.026inch, Lead Free="Lead Free", Length=2mm, Military Standard=Not, Mount="Surface Mount", Number of Terminations=2, Packaging="Tape and Reel", Power Rating=125mW, Radiation Hardening=No, RoHS Compliant=Yes, Series=RMCF, Size Code=0805, Width=0.049inch
R7: library part CMP-07231-005909-1, "Thick Film Chip Resistors 0805 330Ω 0.125W 5% 200ppm/°C", Case Code (Imperial)=0805, Case Code (Metric)=2012, Max Operating Temperature=155°C, Max Power Dissipation=125mW, Min Operating Temperature=-55°C, Package Quantity=1, Resistance=330, Temperature Coefficient=200ppm/°C, Tolerance=5%, Voltage Rating=150V, Case/Package=0805, Composition="Thick Film", Contact Plating=Tin, Depth=1.25mm, Features="Moisture Resistant", Height=0.024inch, Length=2mm, Military Standard=Not, Mount="Surface Mount", Number of Pins=2, Number of Terminations=2, Packaging="Tape and Reel", Power Rating=125mW, Radiation Hardening=No, REACH SVHC="No SVHC", Termination=SMD/SMT, Thickness=508um, Voltage Rating (DC)=150V, Width=0.049inch
R9: library part CMP-2001-00610-2, "RES 20K OHM 0.1% 1/8W 0805", Case Code (Imperial)=0805, Case Code (Metric)=2012, Max Operating Temperature=155°C, Max Power Dissipation=125mW, Min Operating Temperature=-55°C, Package Quantity=1, Resistance=20K, Resistance Tolerance=0.1%, Resistor Type="Thin Film", Temperature Coefficient=25ppm/°C, Voltage Rating=100V, Case/Package=0805, Construction=Rectangular, Contact Plating=Tin, Depth=1.25mm, Features="Automotive AEC-Q200", Height=0.5mm, Lead Free="Lead Free", Length=2mm, Military Standard=Not, Mount="Surface Mount", Number of Pins=2, Number of Terminations=2, Packaging="Tape and Reel", Power Rating=125mW, Radiation Hardening=No, REACH SVHC="No SVHC", RoHS Compliant=Yes, Series=ERA-6A, Size Code=0805, Technology="THIN FILM", Termination=SMD/SMT, Tolerance=0.1%, Voltage Rating (DC)=100V, Width=1.25mm
R10: library part CMP-2001-03885-2, "RES Thick Film, 3.83kΩ, 1%, 0.125W, 100ppm/°C, 0805", Case Code (Imperial)=0805, Case Code (Metric)=2012, Max Operating Temperature=155°C, Max Power Dissipation=125mW, Min Operating Temperature=-55°C, Package Quantity=5000, Resistance=3.83K, Temperature Coefficient=100ppm/°C, Tolerance=1%, Voltage Rating=150V, Case/Package=0805, Composition="Thick Film", Contact Plating=Tin, Depth=1.25mm, Features="Automotive AEC-Q200", Height=0.45mm, Lead Free="Lead Free", Length=2mm, Military Standard=Not, Number of Pins=2, Number of Terminations=2, Packaging="Tape and Reel", Power Rating=125mW, Radiation Hardening=No, Termination=SMD/SMT, Voltage Rating (DC)=150V, Weight=0.000194oz, Width=1.25mm, Working Voltage=150V
R11 R13 R16: library part CMP-2001-03210-2, "1kΩ ±0.5% 0.1W 1/10W Chip Resistor 0805 (2012 Metric) Thin Film", Case Code (Imperial)=0805, Case Code (Metric)=2012, Max Operating Temperature=125°C, Max Power Dissipation=100mW, Min Operating Temperature=-55°C, Package Quantity=1, Resistance=1K, Resistance Tolerance=0.5%, Resistor Type="Thin Film", Temperature Coefficient=25ppm/°C, Voltage Rating=100V, Case/Package=0805, Depth=1.25mm, Height=0.4mm, Lead Free="Lead Free", Length=2mm, Number of Terminations=2, Packaging="Tape and Reel", Power Rating=100mW, RoHS Compliant=Yes, Series=RR, Size Code=0805, Technology="THIN FILM", Termination=SMD/SMT, Tolerance=0.5%, Voltage Rating (DC)=100V, Width=1.25mm
R14: library part CMP-2001-02713-2, "Automotive Metal Thin Film Chip Resistor, 0805, 1MΩ, 0.1%, 25ppm/°C, 0.125W, 150V", Case Code (Imperial)=0805, Case Code (Metric)=2012, Max Operating Temperature=155°C, Max Power Dissipation=125mW, Min Operating Temperature=-55°C, Package Quantity=5000, Power Rating=100mW, Resistance=1M, Temperature Coefficient=25ppm/°C, Tolerance=0.1%, Voltage Rating=100V, Voltage Rating (DC)=150V, Case/Package=0805, Features="Automotive AEC-Q200", Height=0.4mm, Lead Free="Lead Free", Length=2mm, Number of Terminations=2, Packaging="Tape and Reel", RoHS Compliant=Yes, Series=RG, Termination=SMD/SMT, Width=1.25mm
SW1 SW2: library part CMP-05618-000132-1, "SWITCH TACTILE SPST-NO 0.02A 15V", Actuator Color=Natural, Contact Current Rating=20mA, Contact Resistance=100mR, Max Operating Temperature=85°C, Max Voltage Rating (DC)=15V, Min Operating Temperature=-40°C, Operating Force=1.6N, Package Quantity=1, Actuator Length=0.85mm, Color=Natural, Contact Plating=Gold, Current Rating=20mA, Depth=5.5mm, Electrical Life=1000000Cycles, Height=2.5mm, Illumination Type=Non-Illuminated, Lead Free="Lead Free", Length=3.5mm, Max Current Rating=20mA, Mechanical Life=1000000Cycles, Mount="Surface Mount", Orientation=Straight, Packaging="Tape and Reel", Radiation Hardening=No, REACH SVHC="No SVHC", RoHS Compliant=Yes, Series=EVQP2, Size=3.5mm, Switch Function=Off-Mom, Switch Travel=0.25mm, Termination=J-Bend, Throw Configuration=SPST, Voltage Rating (DC)=15V
U1: "Open Frame AC DC Converters 1 Uitgang 12V - - - 1.25A 80 ~ 264 VAC Input", Package="DIP-4 Mean-Well USA, Inc.", Availability="In Stock", Check_prices=https://www.snapeda.com/parts/MFM-15-12/MEAN+WELL+USA+Inc./view-part/?ref=eda, MF="MEAN WELL", MP=MFM-15-12, Price=None, Purchase-URL=https://pricing.snapeda.com/search?q=MFM-15-12&ref=eda, SnapEDA_Link=https://www.snapeda.com/parts/MFM-15-12/MEAN+WELL+USA+Inc./view-part/?ref=snap
U2: library part CMP-0069-00217-3, "SIMPLE SWITCHER® Power Converter 150 KHz 1A Step-Down Voltage Regulator, 5-pin TO-263, Pb-Free", Manufacturer="Texas Instruments", PackageTopMarking="NSUZXYTTE#*LM2595S*-12 P+", PowerWise=N, Code_JEDEC=MO-169-AB, ComponentLink1Description="Datasheet URL", ComponentLink1URL=http://www.ti.com/general/docs/lit/getliterature.tsp?genericPartNumber=LM2595&fileType=pdf, CompType=Switcher, PackageDescription="TO-263, Molded, .400 x .390 x .180in, 5 Lead, .067in Pitch, Surface Mount", PackageReference=KTT0005B, PinCount=5, RoHS=Y
U3: "Integrated Circuit", Manufacturer_Name="Texas Instruments", Mouser Part Number=926-LM2937IMP-33, Arrow Part Number=LM2937IMP-3.3, Arrow Price/Stock=https://www.arrow.com/en/products/lm2937imp-3.3/texas-instruments?region=nac, Datasheet Link=https://www.ti.com/lit/gpn/LM2937, Height=1.8mm, Manufacturer_Part_Number=LM2937IMP-3.3, Mouser Price/Stock=https://www.mouser.co.uk/ProductDetail/Texas-Instruments/LM2937IMP-3.3?qs=X1J7HmVL2ZHQ6GEvMvFiRA%3D%3D
U4: library part ESP32
U5: library part CMP-0994-00001-1, "Low Voltage Audio Power Amplifier, 0 to 70 degC, 8-pin SOIC (D8), Green (RoHS & no Sb/Br)", Manufacturer="Texas Instruments", Code_JEDEC=MS-012, ComponentLink1Description="Manufacturer URL", ComponentLink1URL=http://www.ti.com/, ComponentLink2Description=Datasheet, ComponentLink2URL=http://www.ti.com/general/docs/lit/getliterature.tsp?genericPartNumber=LM386&fileType=pdf, ComponentLink3Description="Package Specification", ComponentLink3URL=http://www.ti.com/litv/pdf/msoi002j, DatasheetVersion=SNAS545A, Eco-Plan="Green (RoHS & no Sb/Br)", Input Type=Analog, Max. Number of Speaker Outputs=1, Mounting Technology="Surface Mount", PackageDescription="8-Pin Plastic Small Outline, Body 4.9 x 3.9 mm, Pitch 1.27 mm", PackageReference=D8, PackageVersion="4040047-3/M, 06/2011", PartNumber=LM386M-1/NOPB, SubFamily="Mid/High-Power Amplifier"
U6: library part "MQ-2 Gas Sensor"
U7: library part CMP-1310-00291-2, "IC OPAMP GP 2 CIRCUIT 8SOIC", Case/Package=SOIC, Dual Supply Voltage=9V, Input Bias Current=250nA, Input Offset Voltage (Vos)=7mV, Max Dual Supply Voltage=16V, Max Operating Temperature=70°C, Max Supply Voltage=32V, Min Dual Supply Voltage=1.5V, Min Operating Temperature=0°C, Min Supply Voltage=3V, Nominal Supply Current=1.2mA, Operating Supply Current=1.5mA, Output Current=40mA, Package Quantity=2500, Power Supply Rejection Ratio (PSRR)=65dB, Voltage Gain=100dB, Bandwidth=1MHz, Common Mode Rejection Ratio=65dB, Contact Plating=Tin, Gain Bandwidth Product=1MHz, Halogen Free="Halogen Free", Height=1.5mm, Lead Free="Lead Free", Length=5mm, Number of Amplifiers=2, Number Of Channels=2, Number of Circuits=2, Number of Elements=2, Number of Pins=8, Operating Supply Voltage=16V, Output Current per Channel=40mA, Packaging="Tape and Reel", Radiation Hardening=No, REACH SVHC="No SVHC", Slew Rate=0.6V/µs, Width=4mm
U8: library part MIKROE-4299
U9: library part CMP-0187-00464-3, "None", Case/Package=SOT-23, Input Bias Current=1pA, Input Offset Voltage (Vos)=4.5mV, Max Operating Temperature=125°C, Max Supply Voltage=6V, Min Operating Temperature=-40°C, Min Supply Voltage=1.8V, Nominal Supply Current=100uA, Operating Supply Voltage=5.5V, Output Current=23mA, Package Quantity=3000, Power Supply Rejection Ratio (PSRR)=86dB, Voltage Gain=112dB, Amplifier Type="GENERAL PURPOSE", Bandwidth=1MHz, Common Mode Rejection Ratio=60dB, Gain Bandwidth Product=1MHz, Height=1.3mm, Lead Free="Lead Free", Length=3.1mm, Mount="Surface Mount", Number of Amplifiers=1, Number Of Channels=1, Number of Circuits=1, Number of Elements=1, Number of Pins=5, Packaging="Tape and Reel", Radiation Hardening=No, REACH SVHC="No SVHC", RoHS Compliant=Yes, Slew Rate=0.6V/µs, Supply Current=100uA, Technology=CMOS, Unity Gain Bandwidth Product=1MHz, Width=1.8mm
U10: library part CMP-2000-06550-1, "Low-Power, Dual-Voltage Comparator, 2 to 36 V, 0 to 70 degC, 8-Pin SOIC (SO), RoHS, Tape and Reel", Current - Input Bias (Max)=0.25µA@5V, Current - Output (Typ)=18mA@5V, Current - Quiescent (Max)=2.5mA, Manufacturer=STMicroelectronics, Operating Temperature=0°C~70°C, Package / Case="8-SOIC(0.154\",3.90mmWidth)", Package Description="8-Pin Small Outline Integrated Circuit, Body 4.9 x 3.9 mm, Pitch 1.27 mm", Package Reference=SO-8, Standard Package=2,500, Supplier Device Package=8-SO, Voltage - Input Offset (Max)=5mV@30V, Voltage - Supply, Single/Dual (±)=2V~36V,±1V~18V, Category=IntegratedCircuits(ICs), Datasheet URL=http://www.st.com/content/ccc/resource/technical/document/datasheet/group1/b4/cc/cf/13/18/28/44/f5/CD00000465/files/CD00000465.pdf/jcr:content/translations/en.CD00000465.pdf, Datasheet Version="Rev. 15, 02/2016", EDA / CAD Models=DownloadfromAcceleratedDesigns, Family=Linear-Comparators, Manufacturer URL=http://www.st.com/, Mounting Technology=SurfaceMount, Mounting Type=SurfaceMount, Number of Elements=2, Online Catalog=Comparators-2elements, Other Names=497-1593-2, Other Related Documents=LM393ViewAllSpecificationsLM393ViewAllSpecifications, Output Type=CMOS,DTL,ECL,MOS,Open-Collector,TTL, Packaging=Tape&Reel(TR), Type=GeneralPurpose

## Via types
v1: diameter 35, hole 15, Top Layer to Bottom Layer, tented both sides, 64 vias

## Nets (pads, with @x,y where several pads share a name; then routed paths per layer and width w, separated by ;. In a path a pad name is that pad's centre, name@x,y a point inside that pad or via, vN(x,y) a via of type N, cw(c..) or ccw(c..) an arc to the next point about the centre after c; other vN are vias at no path point)
AC+: J2.1 U1.1 | length 374.8
  Top Layer w10: U1.1 116.85,990 230,990 340,880 J2.1
AC-: J2.2 U1.2 | length 1349.8
  Top Layer w10: J2.2 143.15,496.85 230,410 380,410 590,620 590,880 690,980 891.68,980 893.8,982.12 917.24,982.12 U1.2
Battery: D3.2 J2.3 R1.2 | length 3206.1
  Top Layer w10: J2.3 550,690 550,2500 730,2680 730,2800 680,2850 310,2850 290,2870 D3.2 404.76,2943.39 425.31,2963.94 425.31,2969.88 444.06,2988.63 R1.2
GND: C1.1 C2.2 C4.2 C5.2 C6.2 C7.2 C9.2 C10.2 C12.2 C13.2 D2.2 D4.1 D5.1 DS1.3 DS2.2 DS3.2 DS3.3 DS4.2 DS4.3 DS5.3 DS6.2 DS7.2 DS7.3 J1.1 J2.4 J3.2 R2.1 R3.1 R6.1 R8.1 R15.1 R16.1 SW1.2 SW1.4 SW2.1 SW2.3 U1.3 U2.3 U2.5 U2.6 U3.2 U3.4 U4.1 U4.40 U4.41 U5.1 U5.2 U5.4 U5.7 U5.8 U6.5 U7.4 U8.8 U8.16 U9.3 U9.5 U10.4 | length 24987.3
  Top Layer w10: C1.1 71.75,3471.75 90,3490 200,3490 220,3510 220,3697.32 U2.6 U2.3 ; R2.1 R2.1@605.91,2989.29 ; U2.5 523.86,3843.86 500,3820 500,3740 520,3720 638.03,3720 U2.3 ; v1(670,3190) 670,3030 ; v1(840,3640) 770,3710 U2.3 ; v1(898.66,3071.34) R8.1 837.2,3071.34 824.48,3058.62 824.48,3044.48 810,3030 670,3030 ; U1.3 823.31,2765.98 625.51,2963.78 625.51,2969.68 R2.1@605.91,2989.29 ; R16.1 1066.82,1323.18 1000,1390 1000,1490 1040,1530 1430,1530 1730,1830 ; U9.5 1158.39,487.4 1150.59,479.61 1150.59,455.63 1107.56,412.6 1017.4,412.6 900,530 DS6.2 900,770 880,790 770,790 745.12,765.12 DS7.2 DS7.3 680,670 680,580 430,330 J2.4 143.15,156.85 270,30 741.34,30 789.41,78.07 789.41,85.94 802.13,98.66 R15.1 945.08,98.66 C12.2 958.86,103.58 972.56,89.88 972.56,87.75 978.42,81.89 D5.1 1131.89,70 1400,70 1440,110 1440,220 1470,250 D4.1 ; v1(1350,3040) 1298.66,2988.66 R6.1@1235.21,2988.66 ; DS4.2 DS3.3 DS3.2 ; v1(1730,1120) 1730,1071.57 U8.8 ; v1(1730,1800) 1730,1830 ; C2.2 1635.98,3620 U3.4 1630,3450 ; v1(2325,3565) 2293.58,3533.58 ; DS5.3 2380,1250 2360,1270 2120,1270 2100,1250 DS2.2 2100,1090 2080,1070 1830,1070 1810,1050 1810,1011.57 U8.8 ; U8.16 2450,50 1600,50 1530,120 1530,241.57 D4.1 ; DS1.3 DS1.3@2815.12,3180 ; v1(2950,1845.35) 2950.24,1845.12 U4.41@2999.76,1845.12 ; v1(2950,1900) 2950.24,1900.24 U4.41@2999.76,1900.24 ; v1(2950.24,1790) U4.41@2999.76,1790 ; U4.41@2994.65,1840 U4.41@2999.76,1845.12 ; U4.41@2994.88,1850 U4.41@2999.53,1845.35 ; v1(2999.53,1949.53) 2999.76,1949.29 U4.41@2999.76,1900.24 ; v1(2999.76,1740.47) U4.41@2999.76,1790 ; U4.41@3000,1900.47 U4.41@2999.76,1900.24 ; U4.41@3050,1905.12 U4.41@3054.88,1900.24 ; v1(3054.88,1740.47) U4.41@3054.88,1790 ; U4.41@3054.88,1845.12 U4.41@2999.76,1845.12 ; v1(3054.88,1949.76) U4.41@3054.88,1900.24 ; U4.41@3060,1784.88 U4.41@3054.88,1790 ; U4.41@3061.5,1906.86 U4.41@3054.88,1900.24 ; v1(3110,1740.47) U4.41@3110,1790 ; v1(3110,1949.29) U4.41@3110,1900.24 ; U4.41@3114.88,1850 U4.41@3110,1845.12 ; U4.41@3115.12,1840 U4.41@3110,1845.12 ; v1(3159.53,1790) U4.41@3110,1790 ; v1(3159.53,1845.12) U4.41@3110,1845.12 ; v1(3159.53,1900.24) U4.41@3110,1900.24 ; U5.8 3265,3096.46 ; U5.7 U5.7@3315,3131.65 ; U5.4 3412.66,2955.88 3412.66,3007.34 3380,3040 3310,3040 3272.34,3002.34 3272.34,3001.07 U5.1@3265,2993.73 ; J3.2 3802.93,3835.65 3802.93,3807.07 3970,3640 3970,3290 3930,3250 3860,3250 3830.63,3279.37 R3.1 3740,3330 3480,3070 3330,3070 3315,3085 U5.7@3315,3131.65 ; SW2.3 SW2.1 3846.54,1726.54 3940,1820 3940,2010 3889.65,2060.35 3859.65,2060.35 J1.1 3740,2070 3660.94,2149.06 U4.40 3358.82,2149.06 U4.41@3110,1900.24 ; R2.1@605.91,2989.29 625.51,3008.9 625.51,3014.8 640.71,3030 670,3030 ; R6.1@1235.21,2988.66 R6.1 1240.92,2999.58 1263.6,2999.58 1602.82,3338.8 1616.3,3338.8 1630,3352.5 U3.2 1630,3450 ; R6.1@1235.21,2988.66 1247.93,2975.94 1247.93,2962.07 1290,2920 1290,2553.82 1254.84,2518.66 1240.26,2518.66 1235,2513.39 U7.4 1348.82,2498.82 1384.88,2534.88 DS4.3 DS3.2 ; D4.1 1538.43,291.57 1416.65,413.35 U10.4 1535,635 1556.42,656.42 C13.2 1688.43,890 U8.8 ; 1630,3450 2016.42,3450 2077.44,3511.02 2077.44,3519.88 2091.14,3533.58 C4.2 C9.2 2293.58,3533.58 ; 1730,1830 1730,1849.47 U6.5 1730,2035 DS3.2 ; 2293.58,3533.58 C10.2 2408.86,3533.58 2422.56,3519.88 2422.56,3511.02 2745.9,3187.69 2807.43,3187.69 DS1.3@2815.12,3180 ; DS1.3@2815.12,3180 2720,3180 2690,3150 2690,3110 2750,3050 2810,3050 2850,3010 C5.2 3256.89,2940 3265,2948.11 U5.1 ; U4.41@2999.53,1845.35 U4.41@2999.76,1845.12 ; U4.41@2999.53,1845.35 2999.53,1900 U4.41@2999.76,1900.24 ; U4.41@2999.76,1790 U4.41@2999.76,1845.12 ; U4.41@2999.76,1790 U4.41@3054.88,1790 ; U4.41@2999.76,1900.24 U4.41@3054.88,1900.24 ; U4.41@3054.88,1790 U4.41@3110,1790 ; U4.41@3054.88,1900.24 U4.41@3110,1900.24 ; U4.41@3110,1790 U4.41@3110,1845.12 ; U4.41@3110,1845.12 3110,1899.76 3110.24,1900 U4.41@3110,1900.24 ; U4.41@3110,1900.24 3082.5,1927.74 3082.5,1987.5 2920.94,2149.06 U4.1 2768.5,2150 2700,2150 2670,2180 2670,2580 2703.46,2613.46 SW1.2 SW1.4 3000.24,2613.46 3014.92,2628.15 3014.92,2637.01 3046.42,2668.5 C7.2 3315.52,2770 3337.09,2748.43 C6.2 3340,2840 3315,2865 U5.2 U5.1 ; U5.1 U5.1@3265,2993.73 ; U5.1@3265,2993.73 3265,3096.46 ; 3265,3096.46 3292.08,3123.53 3306.89,3123.53 U5.7@3315,3131.65
  Bottom Layer w10: v1(670,3190) 840,3360 v1(840,3640) ; v1(898.66,3071.34) 898.66,3148.66 940,3190 1140,3190 1180,3150 1300,3150 1350,3100 v1(1350,3040) ; v1(1730,1120) v1(1730,1800) ; v1(2325,3565) 2325,3795.84 2354.41,3825.24 D2.2
NetC1_2: C1.2 D1.1 D3.1 U2.2 | length 1161.7
  Top Layer w10: D3.1 D1.1 110,3310 165.34,3365.34 165.34,3407.1 C1.2 440,3410 480,3450 480,3600 523.07,3643.07 U2.2
NetC2_1: C2.1 C4.1 C9.1 C10.1 C12.1 DS1.1 DS5.1 L1.2 R5.1 R6.2 R7.2 R8.2 R11.2 R12.2 R13.2 R15.2 U2.4 U3.1 U6.1 U6.2 U6.3 U7.1 U7.2 U7.8 U8.15 U10.2 U10.8 | length 11230.1
  Top Layer w10: U2.4 651.1,3780 940,3780 1050.24,3890.24 L1.2 1230,3870.24 v1(1230,3780) ; R13.2 R11.2 672.93,181.34 R15.2 945.08,181.34 C12.1 950,181.34 R12.2 831.34,288.66 800,320 800,420 830,450 940,450 1030,360 1200,360 1280,440 1280,670 v1(1345,735) U10.2 ; R5.1 R8.2 963.19,2988.66 R7.2 ; v1@1230,3190 R6.2 ; v1(1290,860) 1290,1050 v1(1350,1110) ; U6.3 1267.23,1862.77 U6.2 1267.23,2021.7 U6.1 1140,2254.47 1140,2464.54 1135,2469.54 U7.2 U7.1 U7.8 1085,2815 970,2930 R7.2 ; v1(1540,3450) 1539.45,3449.45 U3.1 1539.45,3352.5 1525.75,3338.8 1512.27,3338.8 1257.52,3084.06 1242.72,3084.06 R6.2 ; v1(1590,840) 1623.35,806.65 U10.8 2535,785 2620,870 ; v1(1810,3520) 1926.48,3520 C2.1 1948.85,3542.37 1992.37,3542.37 2056.42,3606.42 C4.1 C9.1 C10.1 2443.82,3606.42 2801.02,3249.22 2801.02,3235.08 2805.86,3230.24 DS1.1 ; U8.15 2620,320 2620,870 ; DS5.1 2540,1170 2620,1090 2620,870 ; 2620,1000 2620,870 ; R7.2 970.48,2995.96 1005.96,2995.96 1040,3030 1140,3030 1181.34,3071.34 R6.2
  Bottom Layer w10: v1(1230,3200) v1(1230,3780) ; v1(1290,860) 1290,790 1320,760 ; U6.3 1350,1780 v1(1350,1110) ; v1(1345,735) 1320,760 ; v1(1540,3450) 1610,3520 v1(1810,3520) ; v1(1590,840) 1350,840 1320,810 1320,760
NetC3_1: C3.1 C8.2 U5.5 | length 1157.8
  Top Layer w10: C8.2 3241.26,3508.74 3415,3335 U5.5@3415,3161.27 ; U5.5 U5.5@3415,3161.27 ; C3.1 3728.54,3460 3437.92,3169.38 3423.11,3169.38 U5.5@3415,3161.27
NetC3_2: C3.2 R3.2 | length 132.9
  Top Layer w10: R3.2 3909.37,3452.95 C3.2
NetC5_1: C5.1 R4.2 U3.3 U4.2 | length 3480
  Top Layer w10: U4.2 2768.5,2100 2670,2100 2630,2140 2630,2720 2670,2760 2768.66,2760 R4.2 2778.66,2777.87 2765.94,2790.59 2758.07,2790.59 2268.66,3280 1770,3280 1727.61,3322.39 1727.61,3358.93 U3.3 2355.98,3365.98 2758.3,2963.67 2765.28,2963.67 2784.98,2943.97 C5.1
NetC6_1: C6.1 C7.1 R4.1 SW1.1 SW1.3 U4.3 | length 1631.1
  Top Layer w10: v1(2590,2140) 2592.98,2137.02 2592.98,2117.02 2660,2050 2768.5,2050 U4.3 ; v1(2788.62,2471.38) SW1.1 2920,2546.54 ; v1(2917.46,2692.54) 2872.93,2737.07 2872.93,2758.41 R4.1 C7.1 ; v1(2920,2580) 2920,2546.54 ; C6.1 2996.42,2551.57 SW1.3 2920,2546.54
  Bottom Layer w10: v1(2590,2140) 2590,2272.76 v1(2788.62,2471.38) ; v1(2917.46,2692.54) 2920,2690 v1(2920,2580)
NetC11_1: C11.1 D5.2 R14.1 U4.17 U9.4 | length 3044.8
  Top Layer w10: D5.2 1124.73,204.73 1124.73,234.73 v1(1160,270) ; U9.4 1176.1,412.6 1183.9,420.39 1183.9,429.25 1204.65,450 v1(1240,450) ; v1(1420,1220) 1420,1298.82 R14.1 1556.38,1308.82 1571.14,1323.58 C11.1 2893.58,1323.58 2938.94,1368.94 U4.17
  Bottom Layer w10: v1(1160,270) 1240,350 v1(1240,450) 1240,530 1120,650 1120,810 1420,1110 v1(1420,1220)
NetC11_2: C11.2 R10.2 R14.2 R16.2 | length 482.9
  Top Layer w10: R16.2 1277.44,1400 R10.2 1416.25,1397.44 R14.2 1556.38,1411.18 1571.14,1396.42 C11.2
NetC13_1: C13.1 D4.2 R12.1 U4.6 U10.3 | length 3452.2
  Top Layer w10: R12.1 957.87,371.34 970.59,358.62 970.59,350.75 1001.34,320 1280,320 D4.2@1341.57,258.43 ; D4.2 D4.2@1341.57,258.43 ; v1(1483.58,1100) C13.1 1480,886.42 1480,710 1455,685 U10.3 1375,685 1341.57,651.57 D4.2@1341.57,258.43 ; v1(1790,1880) 1840,1880 1860,1900 2768.5,1900 U4.6
  Bottom Layer w10: v1@1483.58,1099.64 1483.58,1843.58 1520,1880 v1(1790,1880)
NetD1_2: D1.2 U1.4 | length 626.8
  Top Layer w10: D1.2 110,2860 190,2780 576.72,2780 578.53,2778.2 602.28,2778.2 U1.4
NetD2_1: D2.1 L1.1 U2.1 | length 1032.3
  Top Layer w10: U2.1 651.89,3580 970,3580 1059.76,3669.76 L1.1 1250.24,3670 1430,3670 1530,3770 D2.1
NetDS1_2: DS1.2 U5.6 | length 692.6
  Top Layer w10: DS1.2 3060,3120 3210,3270 3300,3270 3365,3205 U5.6
NetDS2_1: DS2.1 R10.1 U9.1 | length 1831.8
  Top Layer w10: v1@1070,560 v1(1072.76,557.24) U9.1 ; v1(1072.76,1137.24) 1244.66,1309.15 1266.59,1309.15 R10.1 1280,1210 1320,1170 DS2.1
  Bottom Layer w10: v1(1072.76,557.24) v1(1072.76,1137.24)
NetDS2_3: DS2.3 U4.18 | length 1027.8
  Top Layer w10: DS2.3 2210,1170 v1(2230,1190) ; v1(2890,1290) 2920,1290 2988.94,1358.94 U4.18
  Bottom Layer w10: v1(2230,1190) 2232.32,1190 2250,1207.68 2250,1250 2290,1290 v1(2890,1290)
NetDS3_1: DS3.1 R7.1 | length 1036.2
  Top Layer w10: R7.1 v1(1035.47,3064.53) ; v1(1380,2880) 1670,2880 1730,2820 DS3.1
  Bottom Layer w10: v1(1035.47,3064.53) 1220,2880 v1(1380,2880)
NetDS4_1: DS4.1 R9.1 | length 616.6
  Top Layer w10: v1(1100,2930) R9.1 ; v1(1380,2810) 1440,2810 1460,2790 DS4.1
  Bottom Layer w10: v1(1100,2930) 1220,2810 v1(1380,2810)
NetDS5_2: DS5.2 U9.2 | length 1786.2
  Top Layer w10: U9.2 1040,450 1000,490 1000,580 v1(1170,750) ; v1(2230,1110) 2264.88,1110 2305.9,1151.02 2320.04,1151.02 2324.88,1155.86 DS5.2
  Bottom Layer w10: v1(1170,750) 1170,800 1430,1060 2180,1060 v1(2230,1110)
NetDS6_1: DS6.1 R13.1 | length 344.9
  Top Layer w10: R13.1 670,490 760,580 810,580 840.04,610.04 840.04,675.16 DS6.1
NetDS6_3: DS6.3 U4.7 U10.1 | length 2728.6
  Top Layer w10: DS6.3 955.12,694.14 959.96,698.98 974.1,698.98 975.12,700 1020,700 1105,785 U10.1 1420,788.35 1420,1100 1460,1140 1520,1140 1540,1120 v1(1640,1120) ; v1(1680,1540) 1989.06,1849.06 U4.7
  Bottom Layer w10: v1(1640,1120) 1680,1160 v1(1680,1540)
NetDS7_1: DS7.1 R11.1 | length 826.6
  Top Layer w10: v1(460,160) 518.41,101.59 R11.1 ; v1(460,420) 634.88,594.88 DS7.1
  Bottom Layer w10: v1(460,160) v1(460,420)
NetJ1_2: J1.2 U4.37 | length 403.6
  Top Layer w10: U4.37 3700.94,1999.06 3730,1970 J1.2
NetJ1_3: J1.3 U4.36 | length 424.3
  Top Layer w10: U4.36 3650.94,1949.06 3730,1870 J1.3
NetR1_1: R1.1 R2.2 U4.19 | length 4024.3
  Top Layer w10: R1.1 451.37,3070 R2.2@594.09,3070 ; v1(525.69,2934.31) 530,2938.63 530,3000 574.49,3044.49 574.49,3050.39 R2.2@594.09,3070 ; R2.2 R2.2@594.09,3070 ; v1(2930,1600) 3010,1600 3040,1570 3040,1450.91 U4.19
  Bottom Layer w10: v1(525.69,2934.31) 525.69,2064.31 590,2000 2150,2000 2550,1600 v1(2930,1600)
NetR5_2: R5.2 R9.2 U4.5 | length 2845.4
  Top Layer w10: R5.2 737.87,3071.34 750.59,3084.06 750.59,3091.93 778.66,3120 1056.26,3120 R9.2 1140,3116.26 v1(1140,3120) ; v1(1410,2990) 1710,2990 1940,2760 1940,2320 2310,1950 2768.5,1950 U4.5
  Bottom Layer w10: v1(1140,3120) 1210,3120 1340,2990 v1(1410,2990)
NetSW2_2: SW2.2 SW2.4 U4.27 | length 743.7
  Top Layer w10: U4.27 3510.94,1499.06 3610,1400 3890,1400 3910.94,1420.94 3910.94,1456.09 SW2.4 SW2.2
NetU4_4: U4.4 U6.4 U6.6 U7.3 | length 2174.8
  Top Layer w10: U7.3 1185,2295.86 1190.86,2290 1368.94,2290 U6.4 ; U6.6 U6.4 ; v1(1655.53,2074.47) U6.4 ; v1(2564.47,2074.47) 2639.88,1999.06 U4.4
  Bottom Layer w10: v1(1655.53,2074.47) v1(2564.47,2074.47)
NetU4_23: U4.23 U8.14 | length 1738.8
  Top Layer w10: U8.14 v1(2560,360) ; v1(3230,1030) 3230,1440.91 U4.23
  Bottom Layer w10: v1(2560,360) v1(3230,1030)
NetU4_24: U4.24 U8.13 | length 1787.6
  Top Layer w10: U8.13 v1@2500,400 ; U4.24 3290,1448.78 v1(3290,1190)
  Bottom Layer w10: v1(2510,410) v1(3290,1190)
NetU4_25: U4.25 U8.10 | length 2135.6
  Top Layer w10: U8.10 v1@2350,550 ; U4.25 3338.94,1411.06 3380,1370 3380,1290 v1(3340,1250)
  Bottom Layer w10: v1(2360,560) 3050,1250 v1(3340,1250)
NetU4_38: U4.38 U5.3 | length 1332.1
  Top Layer w10: U5.3 3365,2885 3380,2870 v1(3420,2870) ; U4.38 3599.06,2049.06 v1(3600,2050)
  Bottom Layer w10: v1(3420,2870) 3550,2870 3680,2740 3680,2090 3640,2050 v1(3600,2050)
Speaker: C8.1 J3.1 | length 811.2
  Top Layer w10: C8.1 3070,3837.12 3102.4,3804.72 3116.54,3804.72 3269.69,3651.57 J3.1
pads on no net: J2.5 U4.8 U4.9 U4.10 U4.11 U4.12 U4.13 U4.14 U4.15 U4.16 U4.20 U4.21 U4.22 U4.26 U4.28 U4.29 U4.30 U4.31 U4.32 U4.33 U4.34 U4.35 U4.39 U7.5 U7.6 U7.7 U8.1 U8.2 U8.3 U8.4 U8.5 U8.6 U8.7 U8.9 U8.11 U8.12 U10.5 U10.6 U10.7

## Polygon pours and split planes (outlines as drawn)
GND on Ground Plane (split plane): 3979.9,20.1 20.1,20.1 20.1,3979.9 3979.9,3979.9
Battery on Power Plane (split plane): 3979.9,20.1 20.1,20.1 20.1,3979.9 3979.9,3979.9

## Silkscreen, mask and mechanical layers (free items; w line width, h text height)
Top Overlay:
  text "Speaker" at 2712,3078 h30 r90
  text "GS" at 1882,2558 h30 r90
  text "UVS" at 2498,1158 h30
  text "IRS" at 988,788 h30
Mechanical 1:
  the board outline again, w10

## Text inside footprints (layer, text, board x,y; h text height)
U4: Top Overlay "1" at 2684.45,2119.06 h60